# Allegro board dividers_v1.brd
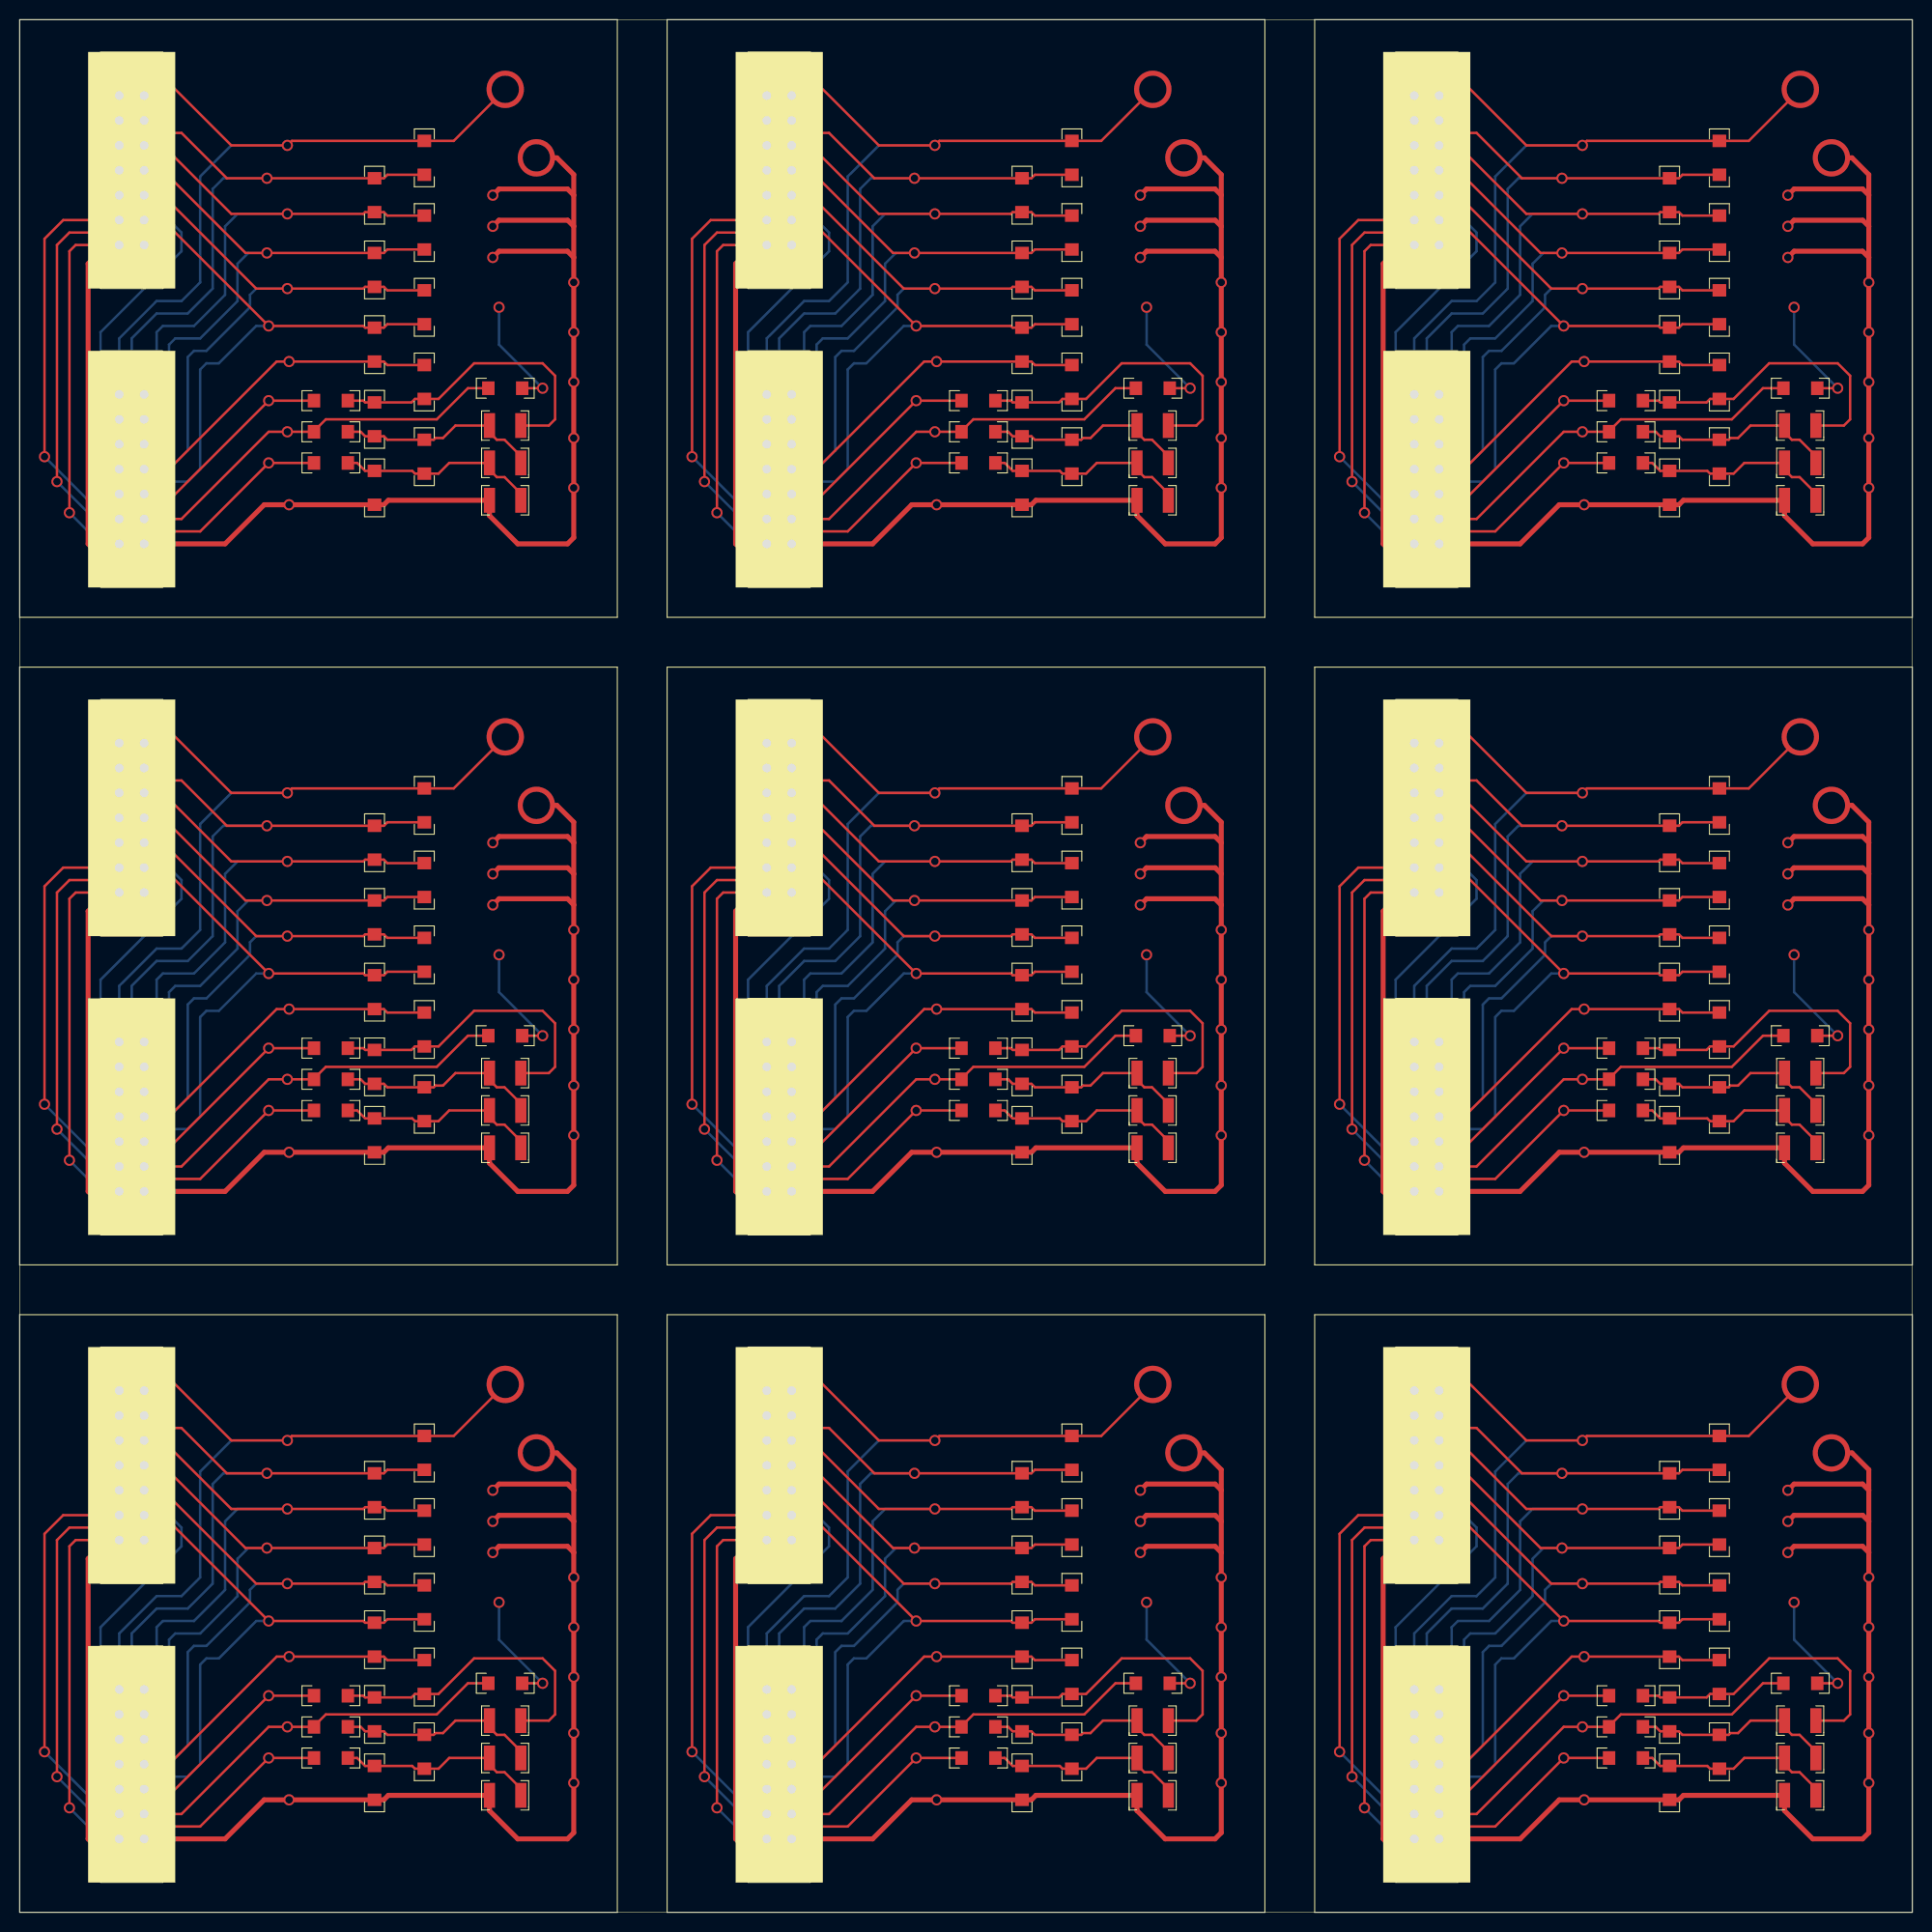
[diagram p0: board, top side]
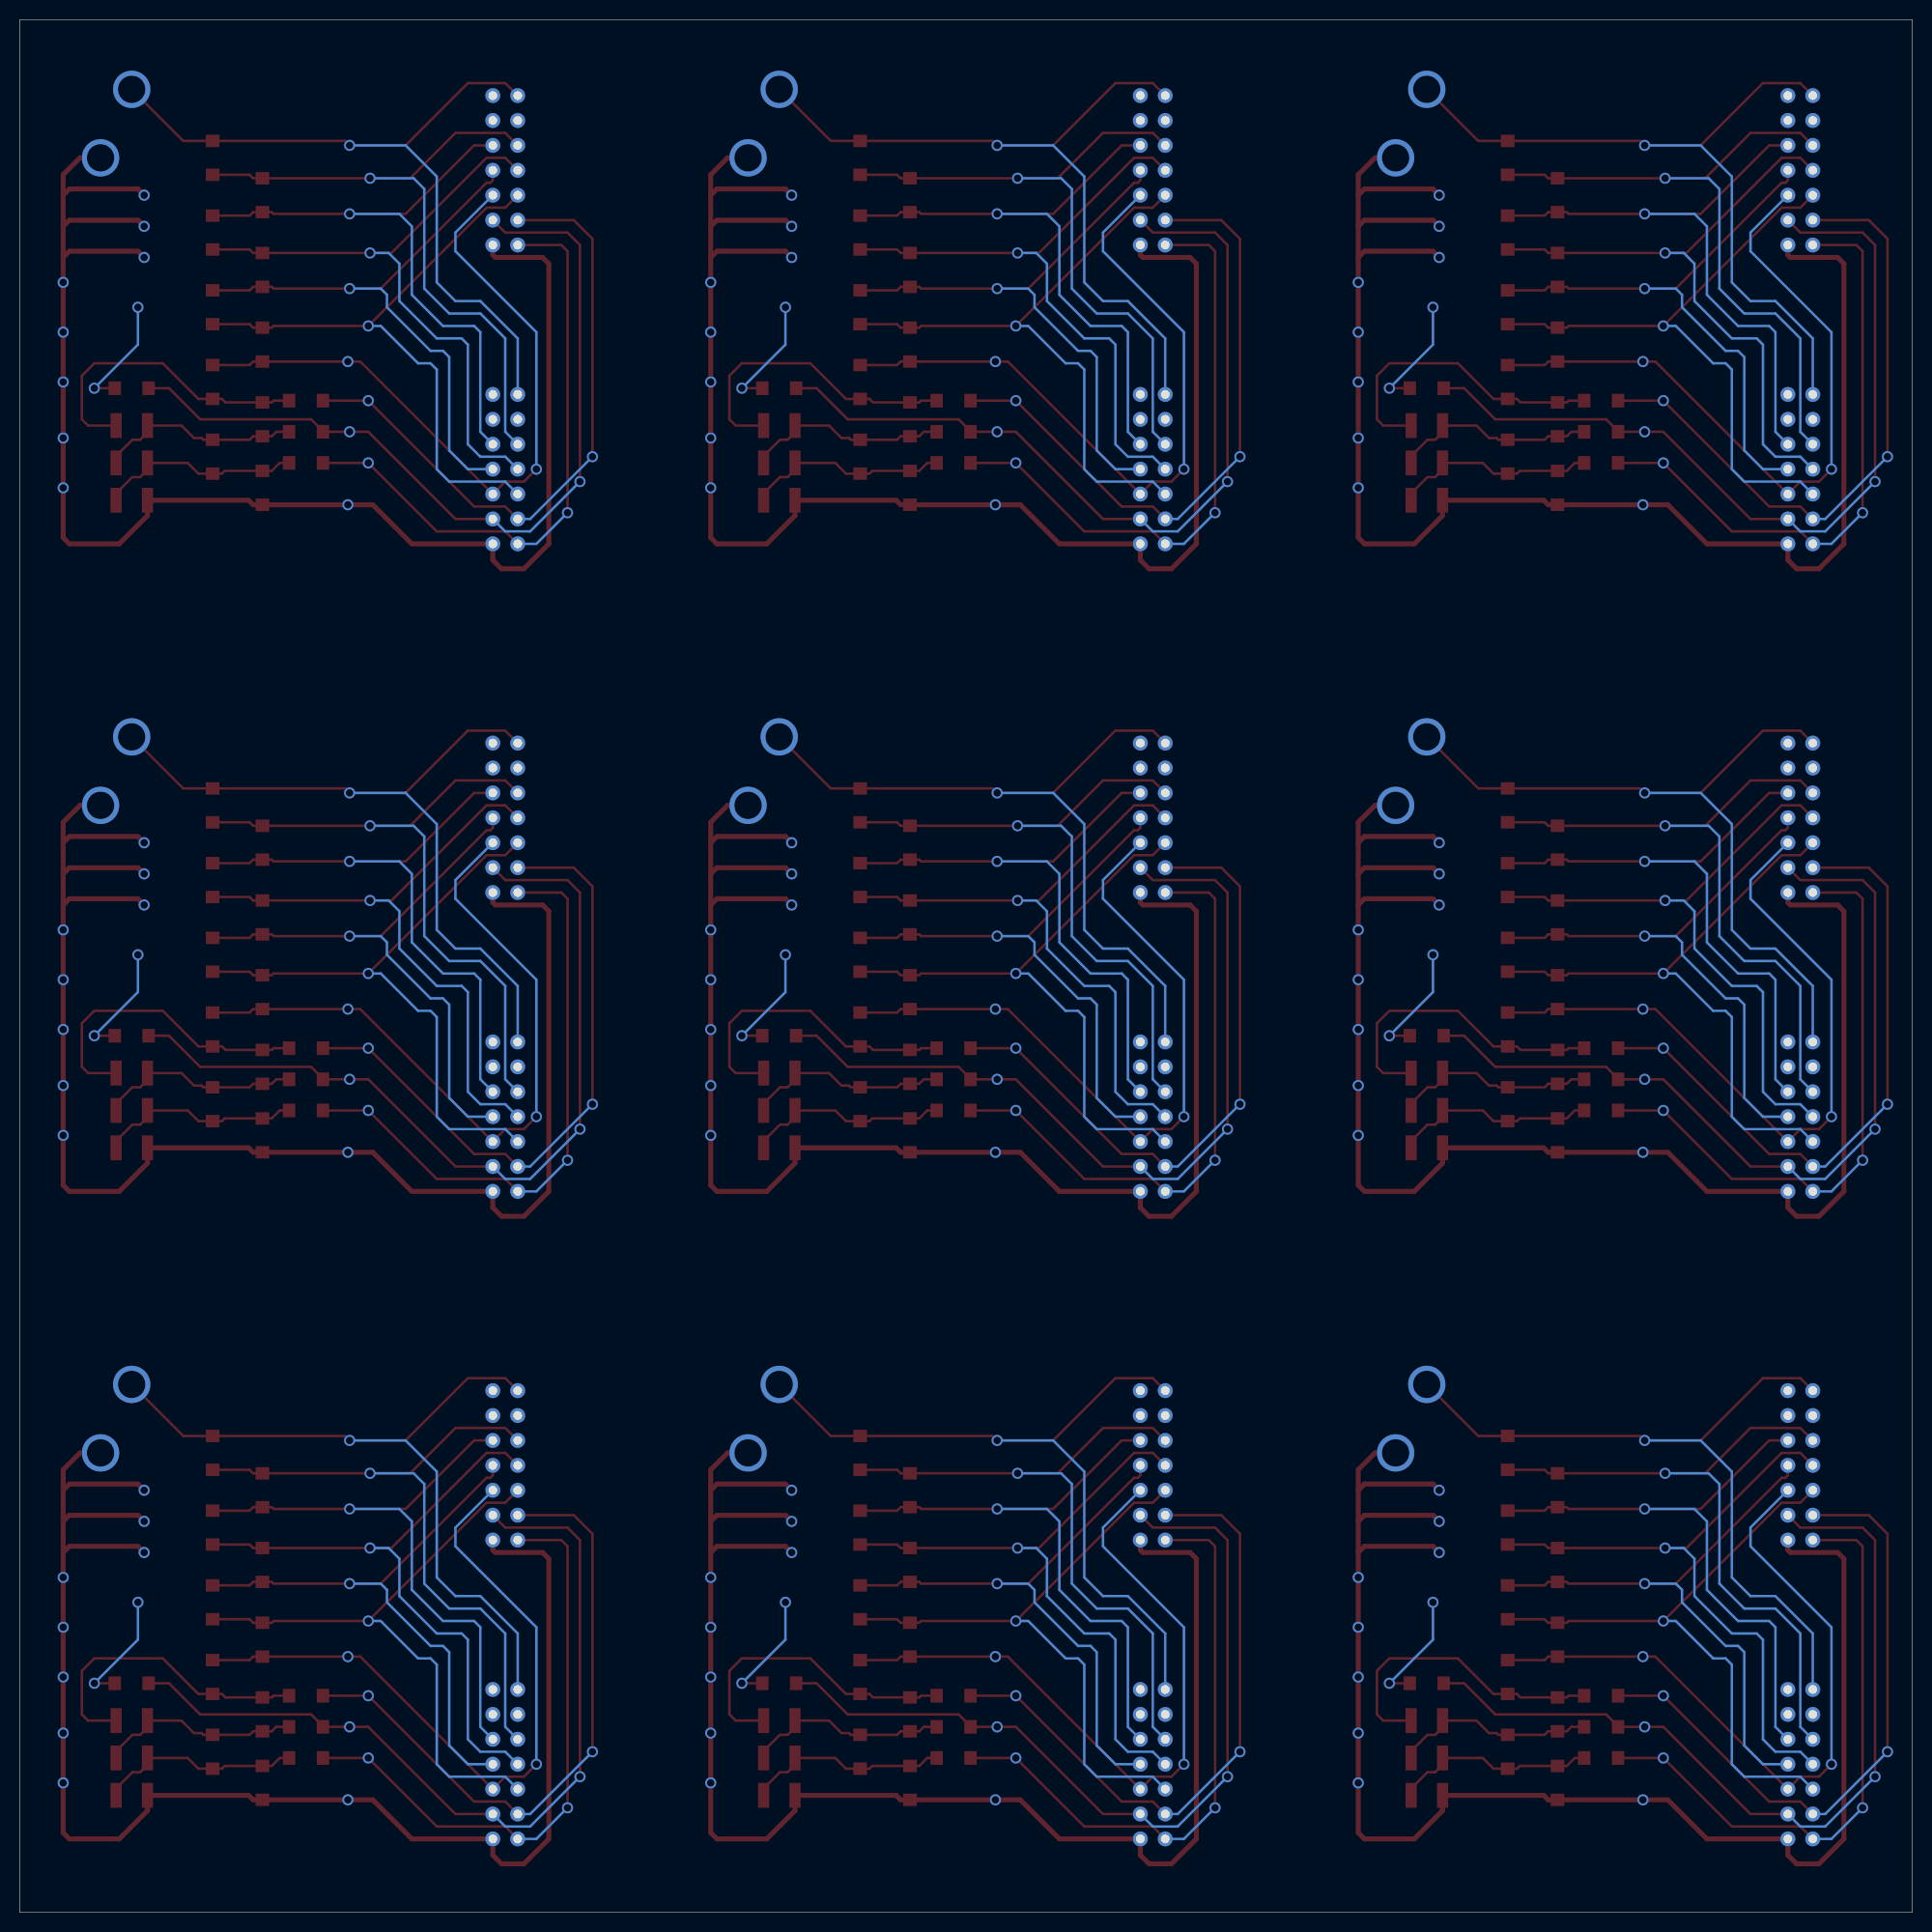
[diagram p1: board, bottom side, seen from below]

Outline 193.04 x 193.04 mm; copper layers: TOP, BOTTOM. Coordinates in mm from the lower left corner of the outline.
Outline path: 0,193.04 0,0 193.04,0 193.04,193.04 0,193.04

## Placement (name value [footprint] x y rotation side)
CT1  0.022UF  [C1210]  49.53 151.64 180 top
CT2  0.022UF  [C1210]  115.57 151.64 180 top
CT3  0.022UF  [C1210]  181.61 151.64 180 top
CT4  0.022UF  [C1210]  49.53 147.83 180 top
CT5  0.022UF  [C1210]  115.57 147.83 180 top
CT6  0.022UF  [C1210]  181.61 147.83 180 top
CT7  0.022UF  [C1210]  49.53 144.02 180 top
CT8  0.022UF  [C1210]  115.57 144.02 180 top
CT9  0.022UF  [C1210]  181.61 144.02 180 top
CT10  0.022UF  [C1210]  49.53 85.6 180 top
CT11  0.022UF  [C1210]  115.57 85.6 180 top
CT12  0.022UF  [C1210]  181.61 85.6 180 top
CT13  0.022UF  [C1210]  49.53 81.79 180 top
CT14  0.022UF  [C1210]  115.57 81.79 180 top
CT15  0.022UF  [C1210]  181.61 81.79 180 top
CT16  0.022UF  [C1210]  49.53 77.98 180 top
CT17  0.022UF  [C1210]  115.57 77.98 180 top
CT18  0.022UF  [C1210]  181.61 77.98 180 top
CT19  0.022UF  [C1210]  49.53 19.56 180 top
CT20  0.022UF  [C1210]  115.57 19.56 180 top
CT21  0.022UF  [C1210]  181.61 19.56 180 top
CT22  0.022UF  [C1210]  49.53 15.75 180 top
CT23  0.022UF  [C1210]  115.57 15.75 180 top
CT24  0.022UF  [C1210]  181.61 15.75 180 top
CT25  0.022UF  [C1210]  49.53 11.94 180 top
CT26  0.022UF  [C1210]  115.57 11.94 180 top
CT27  0.022UF  [C1210]  181.61 11.94 180 top
JT1  -  [HDR14]  11.43 177.67 0 top
JT2  -  [HDR14]  77.47 177.67 0 top
JT3  -  [HDR14]  143.51 177.67 0 top
JT4  -  [HDR14]  11.43 147.19 0 top
JT5  -  [HDR14]  77.47 147.19 0 top
JT6  -  [HDR14]  143.51 147.19 0 top
JT7  -  [HDR14]  11.43 111.63 0 top
JT8  -  [HDR14]  77.47 111.63 0 top
JT9  -  [HDR14]  143.51 111.63 0 top
JT10  -  [HDR14]  11.43 81.15 0 top
JT11  -  [HDR14]  77.47 81.15 0 top
JT12  -  [HDR14]  143.51 81.15 0 top
JT13  -  [HDR14]  11.43 45.59 0 top
JT14  -  [HDR14]  77.47 45.59 0 top
JT15  -  [HDR14]  143.51 45.59 0 top
JT16  -  [HDR14]  11.43 15.11 0 top
JT17  -  [HDR14]  77.47 15.11 0 top
JT18  -  [HDR14]  143.51 15.11 0 top
NOREF  -  []  0 193.04 0 top
NOREF#2  -  []  193.04 0 90 top
RT1  390K  [R1206]  41.27 178.94 270 top
RT2  390K  [R1206]  107.31 178.94 270 top
RT3  390K  [R1206]  173.35 178.94 270 top
RT4  1.44M  [R1206]  36.2 175.13 270 top
RT5  1.44M  [R1206]  102.23 175.13 270 top
RT6  1.44M  [R1206]  168.28 175.13 270 top
RT7  450K  [R1206]  41.27 171.32 270 top
RT8  450K  [R1206]  107.31 171.32 270 top
RT9  450K  [R1206]  173.35 171.32 270 top
RT10  450K  [R1206]  36.2 167.51 270 top
RT11  450K  [R1206]  102.23 167.51 270 top
RT12  450K  [R1206]  168.28 167.51 270 top
RT13  300K  [R1206]  41.27 163.7 270 top
RT14  300K  [R1206]  107.31 163.7 270 top
RT15  300K  [R1206]  173.35 163.7 270 top
RT16  300K  [R1206]  36.2 159.89 270 top
RT17  300K  [R1206]  102.23 159.89 270 top
RT18  300K  [R1206]  168.28 159.89 270 top
RT19  300K  [R1206]  41.27 156.08 270 top
RT20  300K  [R1206]  107.31 156.08 270 top
RT21  300K  [R1206]  173.35 156.08 270 top
RT22  1M  [R1206]  49.53 155.45 180 top
RT23  1M  [R1206]  115.57 155.45 180 top
RT24  1M  [R1206]  181.61 155.45 180 top
RT25  51  [R1206]  31.75 154.18 180 top
RT26  51  [R1206]  97.79 154.18 180 top
RT27  51  [R1206]  163.83 154.18 180 top
RT28  300K  [R1206]  36.2 152.27 270 top
RT29  300K  [R1206]  102.23 152.27 270 top
RT30  300K  [R1206]  168.28 152.27 270 top
RT31  51  [R1206]  31.75 151 180 top
RT32  51  [R1206]  97.79 151 180 top
RT33  51  [R1206]  163.83 151 180 top
RT34  300K  [R1206]  41.27 148.46 270 top
RT35  300K  [R1206]  107.31 148.46 270 top
RT36  300K  [R1206]  173.35 148.46 270 top
RT37  51  [R1206]  31.75 147.83 180 top
RT38  51  [R1206]  97.79 147.83 180 top
RT39  51  [R1206]  163.83 147.83 180 top
RT40  300K  [R1206]  36.2 145.29 270 top
RT41  300K  [R1206]  102.23 145.29 270 top
RT42  300K  [R1206]  168.28 145.29 270 top
RT43  390K  [R1206]  41.27 112.9 270 top
RT44  390K  [R1206]  107.31 112.9 270 top
RT45  390K  [R1206]  173.35 112.9 270 top
RT46  1.44M  [R1206]  36.2 109.09 270 top
RT47  1.44M  [R1206]  102.23 109.09 270 top
RT48  1.44M  [R1206]  168.28 109.09 270 top
RT49  450K  [R1206]  41.27 105.28 270 top
RT50  450K  [R1206]  107.31 105.28 270 top
RT51  450K  [R1206]  173.35 105.28 270 top
RT52  450K  [R1206]  36.2 101.47 270 top
RT53  450K  [R1206]  102.23 101.47 270 top
RT54  450K  [R1206]  168.28 101.47 270 top
RT55  300K  [R1206]  41.27 97.66 270 top
RT56  300K  [R1206]  107.31 97.66 270 top
RT57  300K  [R1206]  173.35 97.66 270 top
RT58  300K  [R1206]  36.2 93.85 270 top
RT59  300K  [R1206]  102.23 93.85 270 top
RT60  300K  [R1206]  168.28 93.85 270 top
RT61  300K  [R1206]  41.27 90.04 270 top
RT62  300K  [R1206]  107.31 90.04 270 top
RT63  300K  [R1206]  173.35 90.04 270 top
RT64  1M  [R1206]  49.53 89.41 180 top
RT65  1M  [R1206]  115.57 89.41 180 top
RT66  1M  [R1206]  181.61 89.41 180 top
RT67  51  [R1206]  31.75 88.14 180 top
RT68  51  [R1206]  97.79 88.14 180 top
RT69  51  [R1206]  163.83 88.14 180 top
RT70  300K  [R1206]  36.2 86.23 270 top
RT71  300K  [R1206]  102.23 86.23 270 top
RT72  300K  [R1206]  168.28 86.23 270 top
RT73  51  [R1206]  31.75 84.96 180 top
RT74  51  [R1206]  97.79 84.96 180 top
RT75  51  [R1206]  163.83 84.96 180 top
RT76  300K  [R1206]  41.27 82.42 270 top
RT77  300K  [R1206]  107.31 82.42 270 top
RT78  300K  [R1206]  173.35 82.42 270 top
RT79  51  [R1206]  31.75 81.79 180 top
RT80  51  [R1206]  97.79 81.79 180 top
RT81  51  [R1206]  163.83 81.79 180 top
RT82  300K  [R1206]  36.2 79.25 270 top
RT83  300K  [R1206]  102.23 79.25 270 top
RT84  300K  [R1206]  168.28 79.25 270 top
RT85  390K  [R1206]  41.27 46.86 270 top
RT86  390K  [R1206]  107.31 46.86 270 top
RT87  390K  [R1206]  173.35 46.86 270 top
RT88  1.44M  [R1206]  36.2 43.05 270 top
RT89  1.44M  [R1206]  102.23 43.05 270 top
RT90  1.44M  [R1206]  168.28 43.05 270 top
RT91  450K  [R1206]  41.27 39.24 270 top
RT92  450K  [R1206]  107.31 39.24 270 top
RT93  450K  [R1206]  173.35 39.24 270 top
RT94  450K  [R1206]  36.2 35.43 270 top
RT95  450K  [R1206]  102.23 35.43 270 top
RT96  450K  [R1206]  168.28 35.43 270 top
RT97  300K  [R1206]  41.27 31.62 270 top
RT98  300K  [R1206]  107.31 31.62 270 top
RT99  300K  [R1206]  173.35 31.62 270 top
RT100  300K  [R1206]  36.2 27.81 270 top
RT101  300K  [R1206]  102.23 27.81 270 top
RT102  300K  [R1206]  168.28 27.81 270 top
RT103  300K  [R1206]  41.27 24 270 top
RT104  300K  [R1206]  107.31 24 270 top
RT105  300K  [R1206]  173.35 24 270 top
RT106  1M  [R1206]  49.53 23.37 180 top
RT107  1M  [R1206]  115.57 23.37 180 top
RT108  1M  [R1206]  181.61 23.37 180 top
RT109  51  [R1206]  31.75 22.1 180 top
RT110  51  [R1206]  97.79 22.1 180 top
RT111  51  [R1206]  163.83 22.1 180 top
RT112  300K  [R1206]  36.2 20.19 270 top
RT113  300K  [R1206]  102.23 20.19 270 top
RT114  300K  [R1206]  168.28 20.19 270 top
RT115  51  [R1206]  31.75 18.92 180 top
RT116  51  [R1206]  97.79 18.92 180 top
RT117  51  [R1206]  163.83 18.92 180 top
RT118  300K  [R1206]  41.27 16.38 270 top
RT119  300K  [R1206]  107.31 16.38 270 top
RT120  300K  [R1206]  173.35 16.38 270 top
RT121  51  [R1206]  31.75 15.75 180 top
RT122  51  [R1206]  97.79 15.75 180 top
RT123  51  [R1206]  163.83 15.75 180 top
RT124  300K  [R1206]  36.2 13.21 270 top
RT125  300K  [R1206]  102.23 13.21 270 top
RT126  300K  [R1206]  168.28 13.21 270 top

## Library data of the parts
CT1-CT27 = CSMD1210: alternate symbols: (C1206); part number: CSMD1210-0.022UF,20%,1210,2KV
JT1-JT18 = CONN14
RT1-RT3 RT43-RT45 RT85-RT87 = RSMD1206: part number: RSMD1206-390K,5%,1206
RT4-RT6 RT46-RT48 RT88-RT90 = RSMD1206: part number: RSMD1206-1.44M,5%,1206
RT7-RT12 RT49-RT54 RT91-RT96 = RSMD1206: part number: RSMD1206-450K,5%,1206
RT13-RT21 RT28-RT30 RT34-RT36 RT40-RT42 RT55-RT63 RT70-RT72 RT76-RT78 RT82-RT84 RT97-RT105 RT112-RT114 RT118-RT120 RT124-RT126 = RSMD1206: part number: RSMD1206-300K,5%,1206
RT22-RT24 RT64-RT66 RT106-RT108 = RSMD1206: part number: RSMD1206-1M,5%,1206
RT25-RT27 RT31-RT33 RT37-RT39 RT67-RT69 RT73-RT75 RT79-RT81 RT109-RT111 RT115-RT117 RT121-RT123 = RSMD1206: part number: RSMD1206-51,5%,1206

## Footprints (pads in the part's own frame, mm; a bottom-side part is the same pattern mirrored in y, then rotated)
C1210
  rect 1.143x2.54 smd: 1(-1.587,0) 2(1.612,0)
HDR14
  round 1.524 hole 0.889: 1(-1.27,7.62) 2(1.27,7.62) 3(-1.27,5.08) 4(1.27,5.08) 5(-1.27,2.54) 6(1.27,2.54) 7(-1.27,0) 8(1.27,0) 9(-1.27,-2.54) 10(1.27,-2.54) 11(-1.27,-5.08) 12(1.27,-5.08) 13(-1.27,-7.62) 14(1.27,-7.62)
R1206
  rect 1.27x1.397 smd: 1(-1.727,0) 2(1.727,0)

## Nets
GND_1: CT25.2(B<0>) JT13.14 JT16.14 RT124.2(B<0>)
GND_2: CT26.2(B<0>) JT14.14 JT17.14 RT125.2(B<0>)
GND_3: CT27.2(B<0>) JT15.14 JT18.14 RT126.2(B<0>)
GND_4: CT16.2(B<0>) JT7.14 JT10.14 RT82.2(B<0>)
GND_5: CT17.2(B<0>) JT8.14 JT11.14 RT83.2(B<0>)
GND_6: CT18.2(B<0>) JT9.14 JT12.14 RT84.2(B<0>)
GND_7: CT7.2(B<0>) JT1.14 JT4.14 RT40.2(B<0>)
GND_8: CT8.2(B<0>) JT2.14 JT5.14 RT41.2(B<0>)
GND_9: CT9.2(B<0>) JT3.14 JT6.14 RT42.2(B<0>)
-HV_1: JT13.1 JT16.1 RT85.1(A<0>)
-HV_2: JT14.1 JT17.1 RT86.1(A<0>)
-HV_3: JT15.1 JT18.1 RT87.1(A<0>)
-HV_4: JT7.1 JT10.1 RT43.1(A<0>)
-HV_5: JT8.1 JT11.1 RT44.1(A<0>)
-HV_6: JT9.1 JT12.1 RT45.1(A<0>)
-HV_7: JT1.1 JT4.1 RT1.1(A<0>)
-HV_8: JT2.1 JT5.1 RT2.1(A<0>)
-HV_9: JT3.1 JT6.1 RT3.1(A<0>)
ACC_1: RT106.1(A<0>)
ACC_2: RT107.1(A<0>)
ACC_3: RT108.1(A<0>)
ACC_4: RT64.1(A<0>)
ACC_5: RT65.1(A<0>)
ACC_6: RT66.1(A<0>)
ACC_7: RT22.1(A<0>)
ACC_8: RT23.1(A<0>)
ACC_9: RT24.1(A<0>)
UNNAMED_1_CONN14_I18_5_1: JT13.5 JT16.5 RT85.2(B<0>) RT88.1(A<0>)
UNNAMED_1_CONN14_I18_5_2: JT14.5 JT17.5 RT86.2(B<0>) RT89.1(A<0>)
UNNAMED_1_CONN14_I18_5_3: JT15.5 JT18.5 RT87.2(B<0>) RT90.1(A<0>)
UNNAMED_1_CONN14_I18_5_4: JT7.5 JT10.5 RT43.2(B<0>) RT46.1(A<0>)
UNNAMED_1_CONN14_I18_5_5: JT8.5 JT11.5 RT44.2(B<0>) RT47.1(A<0>)
UNNAMED_1_CONN14_I18_5_6: JT9.5 JT12.5 RT45.2(B<0>) RT48.1(A<0>)
UNNAMED_1_CONN14_I18_5_7: JT1.5 JT4.5 RT1.2(B<0>) RT4.1(A<0>)
UNNAMED_1_CONN14_I18_5_8: JT2.5 JT5.5 RT2.2(B<0>) RT5.1(A<0>)
UNNAMED_1_CONN14_I18_5_9: JT3.5 JT6.5 RT3.2(B<0>) RT6.1(A<0>)
UNNAMED_1_CONN14_I18_6_1: JT13.6 JT16.6 RT88.2(B<0>) RT91.1(A<0>)
UNNAMED_1_CONN14_I18_6_2: JT14.6 JT17.6 RT89.2(B<0>) RT92.1(A<0>)
UNNAMED_1_CONN14_I18_6_3: JT15.6 JT18.6 RT90.2(B<0>) RT93.1(A<0>)
UNNAMED_1_CONN14_I18_6_4: JT7.6 JT10.6 RT46.2(B<0>) RT49.1(A<0>)
UNNAMED_1_CONN14_I18_6_5: JT8.6 JT11.6 RT47.2(B<0>) RT50.1(A<0>)
UNNAMED_1_CONN14_I18_6_6: JT9.6 JT12.6 RT48.2(B<0>) RT51.1(A<0>)
UNNAMED_1_CONN14_I18_6_7: JT1.6 JT4.6 RT4.2(B<0>) RT7.1(A<0>)
UNNAMED_1_CONN14_I18_6_8: JT2.6 JT5.6 RT5.2(B<0>) RT8.1(A<0>)
UNNAMED_1_CONN14_I18_6_9: JT3.6 JT6.6 RT6.2(B<0>) RT9.1(A<0>)
UNNAMED_1_CONN14_I18_7_1: JT13.7 JT16.7 RT91.2(B<0>) RT94.1(A<0>)
UNNAMED_1_CONN14_I18_7_2: JT14.7 JT17.7 RT92.2(B<0>) RT95.1(A<0>)
UNNAMED_1_CONN14_I18_7_3: JT15.7 JT18.7 RT93.2(B<0>) RT96.1(A<0>)
UNNAMED_1_CONN14_I18_7_4: JT7.7 JT10.7 RT49.2(B<0>) RT52.1(A<0>)
UNNAMED_1_CONN14_I18_7_5: JT8.7 JT11.7 RT50.2(B<0>) RT53.1(A<0>)
UNNAMED_1_CONN14_I18_7_6: JT9.7 JT12.7 RT51.2(B<0>) RT54.1(A<0>)
UNNAMED_1_CONN14_I18_7_7: JT1.7 JT4.7 RT7.2(B<0>) RT10.1(A<0>)
UNNAMED_1_CONN14_I18_7_8: JT2.7 JT5.7 RT8.2(B<0>) RT11.1(A<0>)
UNNAMED_1_CONN14_I18_7_9: JT3.7 JT6.7 RT9.2(B<0>) RT12.1(A<0>)
UNNAMED_1_CONN14_I18_8_1: JT13.8 JT16.8 RT94.2(B<0>) RT97.1(A<0>)
UNNAMED_1_CONN14_I18_8_2: JT14.8 JT17.8 RT95.2(B<0>) RT98.1(A<0>)
UNNAMED_1_CONN14_I18_8_3: JT15.8 JT18.8 RT96.2(B<0>) RT99.1(A<0>)
UNNAMED_1_CONN14_I18_8_4: JT7.8 JT10.8 RT52.2(B<0>) RT55.1(A<0>)
UNNAMED_1_CONN14_I18_8_5: JT8.8 JT11.8 RT53.2(B<0>) RT56.1(A<0>)
UNNAMED_1_CONN14_I18_8_6: JT9.8 JT12.8 RT54.2(B<0>) RT57.1(A<0>)
UNNAMED_1_CONN14_I18_8_7: JT1.8 JT4.8 RT10.2(B<0>) RT13.1(A<0>)
UNNAMED_1_CONN14_I18_8_8: JT2.8 JT5.8 RT11.2(B<0>) RT14.1(A<0>)
UNNAMED_1_CONN14_I18_8_9: JT3.8 JT6.8 RT12.2(B<0>) RT15.1(A<0>)
UNNAMED_1_CONN14_I18_9_1: JT13.9 JT16.9 RT97.2(B<0>) RT100.1(A<0>)
UNNAMED_1_CONN14_I18_9_2: JT14.9 JT17.9 RT98.2(B<0>) RT101.1(A<0>)
UNNAMED_1_CONN14_I18_9_3: JT15.9 JT18.9 RT99.2(B<0>) RT102.1(A<0>)
UNNAMED_1_CONN14_I18_9_4: JT7.9 JT10.9 RT55.2(B<0>) RT58.1(A<0>)
UNNAMED_1_CONN14_I18_9_5: JT8.9 JT11.9 RT56.2(B<0>) RT59.1(A<0>)
UNNAMED_1_CONN14_I18_9_6: JT9.9 JT12.9 RT57.2(B<0>) RT60.1(A<0>)
UNNAMED_1_CONN14_I18_9_7: JT1.9 JT4.9 RT13.2(B<0>) RT16.1(A<0>)
UNNAMED_1_CONN14_I18_9_8: JT2.9 JT5.9 RT14.2(B<0>) RT17.1(A<0>)
UNNAMED_1_CONN14_I18_9_9: JT3.9 JT6.9 RT15.2(B<0>) RT18.1(A<0>)
UNNAMED_1_CONN14_I18_10_1: JT13.10 JT16.10 RT100.2(B<0>) RT103.1(A<0>)
UNNAMED_1_CONN14_I18_10_2: JT14.10 JT17.10 RT101.2(B<0>) RT104.1(A<0>)
UNNAMED_1_CONN14_I18_10_3: JT15.10 JT18.10 RT102.2(B<0>) RT105.1(A<0>)
UNNAMED_1_CONN14_I18_10_4: JT7.10 JT10.10 RT58.2(B<0>) RT61.1(A<0>)
UNNAMED_1_CONN14_I18_10_5: JT8.10 JT11.10 RT59.2(B<0>) RT62.1(A<0>)
UNNAMED_1_CONN14_I18_10_6: JT9.10 JT12.10 RT60.2(B<0>) RT63.1(A<0>)
UNNAMED_1_CONN14_I18_10_7: JT1.10 JT4.10 RT16.2(B<0>) RT19.1(A<0>)
UNNAMED_1_CONN14_I18_10_8: JT2.10 JT5.10 RT17.2(B<0>) RT20.1(A<0>)
UNNAMED_1_CONN14_I18_10_9: JT3.10 JT6.10 RT18.2(B<0>) RT21.1(A<0>)
UNNAMED_1_CONN14_I18_11_1: JT13.11 JT16.11 RT109.2(B<0>)
UNNAMED_1_CONN14_I18_11_2: JT14.11 JT17.11 RT110.2(B<0>)
UNNAMED_1_CONN14_I18_11_3: JT15.11 JT18.11 RT111.2(B<0>)
UNNAMED_1_CONN14_I18_11_4: JT7.11 JT10.11 RT67.2(B<0>)
UNNAMED_1_CONN14_I18_11_5: JT8.11 JT11.11 RT68.2(B<0>)
UNNAMED_1_CONN14_I18_11_6: JT9.11 JT12.11 RT69.2(B<0>)
UNNAMED_1_CONN14_I18_11_7: JT1.11 JT4.11 RT25.2(B<0>)
UNNAMED_1_CONN14_I18_11_8: JT2.11 JT5.11 RT26.2(B<0>)
UNNAMED_1_CONN14_I18_11_9: JT3.11 JT6.11 RT27.2(B<0>)
UNNAMED_1_CONN14_I18_12_1: JT13.12 JT16.12 RT106.2(B<0>) RT115.2(B<0>)
UNNAMED_1_CONN14_I18_12_2: JT14.12 JT17.12 RT107.2(B<0>) RT116.2(B<0>)
UNNAMED_1_CONN14_I18_12_3: JT15.12 JT18.12 RT108.2(B<0>) RT117.2(B<0>)
UNNAMED_1_CONN14_I18_12_4: JT7.12 JT10.12 RT64.2(B<0>) RT73.2(B<0>)
UNNAMED_1_CONN14_I18_12_5: JT8.12 JT11.12 RT65.2(B<0>) RT74.2(B<0>)
UNNAMED_1_CONN14_I18_12_6: JT9.12 JT12.12 RT66.2(B<0>) RT75.2(B<0>)
UNNAMED_1_CONN14_I18_12_7: JT1.12 JT4.12 RT22.2(B<0>) RT31.2(B<0>)
UNNAMED_1_CONN14_I18_12_8: JT2.12 JT5.12 RT23.2(B<0>) RT32.2(B<0>)
UNNAMED_1_CONN14_I18_12_9: JT3.12 JT6.12 RT24.2(B<0>) RT33.2(B<0>)
UNNAMED_1_CONN14_I18_13_1: JT13.13 JT16.13 RT121.2(B<0>)
UNNAMED_1_CONN14_I18_13_2: JT14.13 JT17.13 RT122.2(B<0>)
UNNAMED_1_CONN14_I18_13_3: JT15.13 JT18.13 RT123.2(B<0>)
UNNAMED_1_CONN14_I18_13_4: JT7.13 JT10.13 RT79.2(B<0>)
UNNAMED_1_CONN14_I18_13_5: JT8.13 JT11.13 RT80.2(B<0>)
UNNAMED_1_CONN14_I18_13_6: JT9.13 JT12.13 RT81.2(B<0>)
UNNAMED_1_CONN14_I18_13_7: JT1.13 JT4.13 RT37.2(B<0>)
UNNAMED_1_CONN14_I18_13_8: JT2.13 JT5.13 RT38.2(B<0>)
UNNAMED_1_CONN14_I18_13_9: JT3.13 JT6.13 RT39.2(B<0>)
UNNAMED_1_CSMD1210_I15_A_1: CT19.1(A<0>) RT103.2(B<0>) RT109.1(A<0>) RT112.1(A<0>)
UNNAMED_1_CSMD1210_I15_A_2: CT20.1(A<0>) RT104.2(B<0>) RT110.1(A<0>) RT113.1(A<0>)
UNNAMED_1_CSMD1210_I15_A_3: CT21.1(A<0>) RT105.2(B<0>) RT111.1(A<0>) RT114.1(A<0>)
UNNAMED_1_CSMD1210_I15_A_4: CT10.1(A<0>) RT61.2(B<0>) RT67.1(A<0>) RT70.1(A<0>)
UNNAMED_1_CSMD1210_I15_A_5: CT11.1(A<0>) RT62.2(B<0>) RT68.1(A<0>) RT71.1(A<0>)
UNNAMED_1_CSMD1210_I15_A_6: CT12.1(A<0>) RT63.2(B<0>) RT69.1(A<0>) RT72.1(A<0>)
UNNAMED_1_CSMD1210_I15_A_7: CT1.1(A<0>) RT19.2(B<0>) RT25.1(A<0>) RT28.1(A<0>)
UNNAMED_1_CSMD1210_I15_A_8: CT2.1(A<0>) RT20.2(B<0>) RT26.1(A<0>) RT29.1(A<0>)
UNNAMED_1_CSMD1210_I15_A_9: CT3.1(A<0>) RT21.2(B<0>) RT27.1(A<0>) RT30.1(A<0>)
UNNAMED_1_CSMD1210_I15_B_1: CT19.2(B<0>) CT22.1(A<0>) RT112.2(B<0>) RT115.1(A<0>) RT118.1(A<0>)
UNNAMED_1_CSMD1210_I15_B_2: CT20.2(B<0>) CT23.1(A<0>) RT113.2(B<0>) RT116.1(A<0>) RT119.1(A<0>)
UNNAMED_1_CSMD1210_I15_B_3: CT21.2(B<0>) CT24.1(A<0>) RT114.2(B<0>) RT117.1(A<0>) RT120.1(A<0>)
UNNAMED_1_CSMD1210_I15_B_4: CT10.2(B<0>) CT13.1(A<0>) RT70.2(B<0>) RT73.1(A<0>) RT76.1(A<0>)
UNNAMED_1_CSMD1210_I15_B_5: CT11.2(B<0>) CT14.1(A<0>) RT71.2(B<0>) RT74.1(A<0>) RT77.1(A<0>)
UNNAMED_1_CSMD1210_I15_B_6: CT12.2(B<0>) CT15.1(A<0>) RT72.2(B<0>) RT75.1(A<0>) RT78.1(A<0>)
UNNAMED_1_CSMD1210_I15_B_7: CT1.2(B<0>) CT4.1(A<0>) RT28.2(B<0>) RT31.1(A<0>) RT34.1(A<0>)
UNNAMED_1_CSMD1210_I15_B_8: CT2.2(B<0>) CT5.1(A<0>) RT29.2(B<0>) RT32.1(A<0>) RT35.1(A<0>)
UNNAMED_1_CSMD1210_I15_B_9: CT3.2(B<0>) CT6.1(A<0>) RT30.2(B<0>) RT33.1(A<0>) RT36.1(A<0>)
UNNAMED_1_CSMD1210_I16_A_1: CT22.2(B<0>) CT25.1(A<0>) RT118.2(B<0>) RT121.1(A<0>) RT124.1(A<0>)
UNNAMED_1_CSMD1210_I16_A_2: CT23.2(B<0>) CT26.1(A<0>) RT119.2(B<0>) RT122.1(A<0>) RT125.1(A<0>)
UNNAMED_1_CSMD1210_I16_A_3: CT24.2(B<0>) CT27.1(A<0>) RT120.2(B<0>) RT123.1(A<0>) RT126.1(A<0>)
UNNAMED_1_CSMD1210_I16_A_4: CT13.2(B<0>) CT16.1(A<0>) RT76.2(B<0>) RT79.1(A<0>) RT82.1(A<0>)
UNNAMED_1_CSMD1210_I16_A_5: CT14.2(B<0>) CT17.1(A<0>) RT77.2(B<0>) RT80.1(A<0>) RT83.1(A<0>)
UNNAMED_1_CSMD1210_I16_A_6: CT15.2(B<0>) CT18.1(A<0>) RT78.2(B<0>) RT81.1(A<0>) RT84.1(A<0>)
UNNAMED_1_CSMD1210_I16_A_7: CT4.2(B<0>) CT7.1(A<0>) RT34.2(B<0>) RT37.1(A<0>) RT40.1(A<0>)
UNNAMED_1_CSMD1210_I16_A_8: CT5.2(B<0>) CT8.1(A<0>) RT35.2(B<0>) RT38.1(A<0>) RT41.1(A<0>)
UNNAMED_1_CSMD1210_I16_A_9: CT6.2(B<0>) CT9.1(A<0>) RT36.2(B<0>) RT39.1(A<0>) RT42.1(A<0>)

Pads without a net: JT1 2 3 4; JT2 2 3 4; JT3 2 3 4; JT4 2 3 4; JT5 2 3 4; JT6 2 3 4; JT7 2 3 4; JT8 2 3 4; JT9 2 3 4; JT10 2 3 4; JT11 2 3 4; JT12 2 3 4; JT13 2 3 4; JT14 2 3 4; JT15 2 3 4; JT16 2 3 4; JT17 2 3 4; JT18 2 3 4

## Via types
v1: diameter 1.143, hole 0.762, TOP to BOTTOM, 225 vias
v2: diameter 3.81, hole 2.794, TOP to BOTTOM, 18 vias

## Routing (per net, layer and track width the routed paths; a pad name or vN(x,y) marks a point on that pad's centre or on a via; arc(x,y) is an arc through that point)
GND_1: length 161
  TOP w0.508: 56.52,36.7 v1(56.52,34.16) v1(56.52,29.08) v1(56.52,24) v1(56.52,18.29) v1(56.52,13.21) 56.52,8.13 55.88,7.49 50.8,7.49 47.92,10.38 CT25.2 37.6,11.94 37.15,11.48 RT124.2 v1(27.48,11.48) 24.94,11.48 20.95,7.49 JT16.14 12.7,5.84 11.81,4.95 9.53,4.95 6.99,7.49 6.99,36.07 7.62,36.7 12.45,36.7 12.7,36.96 12.7,37.97 ; 56.52,36.7 55.88,37.34 48.9,37.34 v1(48.26,36.7) ; 56.52,36.7 56.52,39.88 ; 56.52,39.88 56.52,43.05 ; 56.52,39.88 55.9,40.5 48.88,40.5 v1(48.26,39.88) ; 56.52,43.05 55.88,43.69 48.9,43.69 v1(48.26,43.05) ; 56.52,43.05 56.52,45.15 54.8,46.86 v2(52.7,46.86)
GND_2: length 161
  TOP w0.508: 78.74,37.97 78.74,36.96 78.49,36.7 73.66,36.7 73.03,36.07 73.03,7.49 75.56,4.95 77.85,4.95 78.74,5.84 JT17.14 87,7.49 90.98,11.48 v1(93.52,11.48) RT125.2 103.19,11.48 103.64,11.94 CT26.2 113.96,10.38 116.84,7.49 121.92,7.49 122.56,8.13 v1(122.56,13.21) v1(122.56,18.29) v1(122.56,24) v1(122.56,29.08) v1(122.56,34.16) 122.56,36.7 ; v1(114.3,39.88) 114.92,40.5 121.94,40.5 122.56,39.88 ; v1(114.3,36.7) 114.94,37.34 121.92,37.34 122.56,36.7 ; 122.56,39.88 122.56,43.05 ; 122.56,39.88 122.56,36.7 ; 122.56,43.05 122.56,45.15 120.84,46.86 v2(118.75,46.86) ; 122.56,43.05 121.92,43.69 114.94,43.69 v1(114.3,43.05)
GND_3: length 161
  TOP w0.508: v1(180.34,43.05) 180.97,43.69 187.96,43.69 188.59,43.05 ; 188.59,36.7 188.59,39.88 ; 188.59,36.7 187.96,37.34 180.97,37.34 v1(180.34,36.7) ; 188.59,36.7 v1(188.59,34.16) v1(188.59,29.08) v1(188.59,24) v1(188.59,18.29) v1(188.59,13.21) 188.59,8.13 187.96,7.49 182.88,7.49 180,10.38 CT27.2 169.68,11.94 169.23,11.48 RT126.2 v1(159.56,11.48) 157.02,11.48 153.03,7.49 JT18.14 144.78,5.84 143.89,4.95 141.6,4.95 139.06,7.49 139.06,36.07 139.7,36.7 144.53,36.7 144.78,36.96 144.78,37.97 ; 188.59,39.88 187.98,40.5 180.96,40.5 v1(180.34,39.88) ; 188.59,39.88 188.59,43.05 ; 188.59,43.05 188.59,45.15 186.88,46.86 v2(184.78,46.86)
GND_4: length 161
  TOP w0.508: JT7.14 12.7,103 12.45,102.74 7.62,102.74 6.99,102.11 6.99,73.53 9.53,70.99 11.81,70.99 12.7,71.88 JT10.14 20.95,73.53 24.94,77.52 v1(27.48,77.52) RT82.2 37.15,77.52 37.6,77.98 CT16.2 47.92,76.42 50.8,73.53 55.88,73.53 56.52,74.17 v1(56.52,79.25) v1(56.52,84.33) v1(56.52,90.04) v1(56.52,95.12) v1(56.52,100.2) 56.52,102.74 ; 56.52,105.92 55.9,106.54 48.88,106.54 v1(48.26,105.92) ; 56.52,105.92 56.52,102.74 ; 56.52,105.92 56.52,109.09 ; 56.52,102.74 55.88,103.38 48.9,103.38 v1(48.26,102.74) ; v1(48.26,109.09) 48.9,109.73 55.88,109.73 56.52,109.09 ; 56.52,109.09 56.52,111.19 54.8,112.9 v2(52.7,112.9)
GND_5: length 161
  TOP w0.508: 122.56,105.92 121.94,106.54 114.92,106.54 v1(114.3,105.92) ; 122.56,105.92 122.56,109.09 ; 122.56,105.92 122.56,102.74 ; 122.56,109.09 122.56,111.19 120.84,112.9 v2(118.75,112.9) ; 122.56,109.09 121.92,109.73 114.94,109.73 v1(114.3,109.09) ; 122.56,102.74 121.92,103.38 114.94,103.38 v1(114.3,102.74) ; 122.56,102.74 v1(122.56,100.2) v1(122.56,95.12) v1(122.56,90.04) v1(122.56,84.33) v1(122.56,79.25) 122.56,74.17 121.92,73.53 116.84,73.53 113.96,76.42 CT17.2 103.64,77.98 103.19,77.52 RT83.2 v1(93.52,77.52) 90.98,77.52 87,73.53 JT11.14 78.74,71.88 77.85,70.99 75.56,70.99 73.03,73.53 73.03,102.11 73.66,102.74 78.49,102.74 78.74,103 JT8.14
GND_6: length 161
  TOP w0.508: JT9.14 144.78,103 144.53,102.74 139.7,102.74 139.06,102.11 139.06,73.53 141.6,70.99 143.89,70.99 144.78,71.88 JT12.14 153.03,73.53 157.02,77.52 v1(159.56,77.52) RT84.2 169.23,77.52 169.68,77.98 CT18.2 180,76.42 182.88,73.53 187.96,73.53 188.59,74.17 v1(188.59,79.25) v1(188.59,84.33) v1(188.59,90.04) v1(188.59,95.12) v1(188.59,100.2) 188.59,102.74 ; v1(180.34,109.09) 180.97,109.73 187.96,109.73 188.59,109.09 ; 188.59,102.74 187.96,103.38 180.97,103.38 v1(180.34,102.74) ; 188.59,102.74 188.59,105.92 ; 188.59,109.09 188.59,105.92 ; 188.59,109.09 188.59,111.19 186.88,112.9 v2(184.78,112.9) ; 188.59,105.92 187.98,106.54 180.96,106.54 v1(180.34,105.92)
GND_7: length 161
  TOP w0.508: v1(48.26,175.13) 48.9,175.77 55.88,175.77 56.52,175.13 ; 56.52,168.78 56.52,171.96 ; 56.52,168.78 v1(56.52,166.24) v1(56.52,161.16) v1(56.52,156.08) v1(56.52,150.37) v1(56.52,145.29) 56.52,140.21 55.88,139.57 50.8,139.57 47.92,142.46 CT7.2 37.6,144.02 37.15,143.56 RT40.2 v1(27.48,143.56) 24.94,143.56 20.95,139.57 JT4.14 12.7,137.92 11.81,137.03 9.53,137.03 6.99,139.57 6.99,168.15 7.62,168.78 12.45,168.78 12.7,169.04 JT1.14 ; 56.52,168.78 55.88,169.42 48.9,169.42 v1(48.26,168.78) ; 56.52,171.96 56.52,175.13 ; 56.52,171.96 55.9,172.58 48.88,172.58 v1(48.26,171.96) ; v2(52.7,178.94) 54.8,178.94 56.52,177.23 56.52,175.13
GND_8: length 161
  TOP w0.508: v1(114.3,175.13) 114.94,175.77 121.92,175.77 122.56,175.13 ; v1(114.3,171.96) 114.92,172.58 121.94,172.58 122.56,171.96 ; 122.56,175.13 122.56,177.23 120.84,178.94 v2(118.75,178.94) ; 122.56,175.13 122.56,171.96 ; v1(114.3,168.78) 114.94,169.42 121.92,169.42 122.56,168.78 ; 122.56,168.78 v1(122.56,166.24) v1(122.56,161.16) v1(122.56,156.08) v1(122.56,150.37) v1(122.56,145.29) 122.56,140.21 121.92,139.57 116.84,139.57 113.96,142.46 CT8.2 103.64,144.02 103.19,143.56 RT41.2 v1(93.52,143.56) 90.98,143.56 87,139.57 JT5.14 78.74,137.92 77.85,137.03 75.56,137.03 73.03,139.57 73.03,168.15 73.66,168.78 78.49,168.78 78.74,169.04 JT2.14 ; 122.56,168.78 122.56,171.96
GND_9: length 161
  TOP w0.508: v1(180.34,171.96) 180.96,172.58 187.98,172.58 188.59,171.96 ; 188.59,171.96 188.59,168.78 ; 188.59,171.96 188.59,175.13 ; v1(180.34,168.78) 180.97,169.42 187.96,169.42 188.59,168.78 ; JT3.14 144.78,169.04 144.53,168.78 139.7,168.78 139.06,168.15 139.06,139.57 141.6,137.03 143.89,137.03 144.78,137.92 JT6.14 153.03,139.57 157.02,143.56 v1(159.56,143.56) RT42.2 169.23,143.56 169.68,144.02 CT9.2 180,142.46 182.88,139.57 187.96,139.57 188.59,140.21 v1(188.59,145.29) v1(188.59,150.37) v1(188.59,156.08) v1(188.59,161.16) v1(188.59,166.24) 188.59,168.78 ; 188.59,175.13 188.59,177.23 186.88,178.94 v2(184.78,178.94) ; 188.59,175.13 187.96,175.77 180.97,175.77 v1(180.34,175.13)
-HV_1: length 82.2
  TOP w0.254: v2(49.53,53.85) 44.27,48.59 RT85.1 27.76,48.59 v1(27.3,48.13) 21.59,48.13 15.24,54.48 11.43,54.48 JT13.1
  BOTTOM w0.254: JT16.1 10.16,28.45 13.97,32.26 16.51,32.26 18.41,34.16 18.41,44.96 21.59,48.13 v1(27.3,48.13)
-HV_2: length 82.2
  TOP w0.254: v2(115.57,53.85) 110.31,48.59 RT86.1 93.8,48.59 v1(93.34,48.13) 87.63,48.13 81.28,54.48 77.47,54.48 JT14.1
  BOTTOM w0.254: JT17.1 76.2,28.45 80.01,32.26 82.55,32.26 84.45,34.16 84.45,44.96 87.63,48.13 v1(93.34,48.13)
-HV_3: length 82.2
  TOP w0.254: v2(181.61,53.85) 176.35,48.59 RT87.1 159.84,48.59 v1(159.38,48.13) 153.67,48.13 147.32,54.48 143.51,54.48 JT15.1
  BOTTOM w0.254: JT18.1 142.24,28.45 146.05,32.26 148.59,32.26 150.5,34.16 150.5,44.96 153.67,48.13 v1(159.38,48.13)
-HV_4: length 82.2
  TOP w0.254: JT7.1 11.43,120.52 15.24,120.52 21.59,114.17 v1(27.3,114.17) 27.76,114.63 RT43.1 44.27,114.63 v2(49.53,119.89)
  BOTTOM w0.254: 10.16,88.77 10.16,94.49 13.97,98.3 16.51,98.3 18.41,100.2 18.41,111 21.59,114.17 v1(27.3,114.17)
-HV_5: length 82.2
  TOP w0.254: v2(115.57,119.89) 110.31,114.63 RT44.1 93.8,114.63 v1(93.34,114.17) 87.63,114.17 81.28,120.52 77.47,120.52 JT8.1
  BOTTOM w0.254: v1(93.34,114.17) 87.63,114.17 84.45,111 84.45,100.2 82.55,98.3 80.01,98.3 76.2,94.49 76.2,88.77
-HV_6: length 82.2
  TOP w0.254: v2(181.61,119.89) 176.35,114.63 RT45.1 159.84,114.63 v1(159.38,114.17) 153.67,114.17 147.32,120.52 143.51,120.52 JT9.1
  BOTTOM w0.254: v1(159.38,114.17) 153.67,114.17 150.5,111 150.5,100.2 148.59,98.3 146.05,98.3 142.24,94.49 142.24,88.77
-HV_7: length 82.2
  TOP w0.254: v2(49.53,185.93) 44.27,180.67 RT1.1 27.76,180.67 v1(27.3,180.21) 21.59,180.21 15.24,186.56 11.43,186.56 JT1.1
  BOTTOM w0.254: v1(27.3,180.21) 21.59,180.21 18.41,177.04 18.41,166.24 16.51,164.34 13.97,164.34 10.16,160.53 10.16,154.81
-HV_8: length 82.2
  TOP w0.254: v2(115.57,185.93) 110.31,180.67 RT2.1 93.8,180.67 v1(93.34,180.21) 87.63,180.21 81.28,186.56 77.47,186.56 JT2.1
  BOTTOM w0.254: v1(93.34,180.21) 87.63,180.21 84.45,177.04 84.45,166.24 82.55,164.34 80.01,164.34 76.2,160.53 76.2,154.81
-HV_9: length 82.2
  TOP w0.254: v2(181.61,185.93) 176.35,180.67 RT3.1 159.84,180.67 v1(159.38,180.21) 153.67,180.21 147.32,186.56 143.51,186.56 JT3.1
  BOTTOM w0.254: v1(159.38,180.21) 153.67,180.21 150.5,177.04 150.5,166.24 148.59,164.34 146.05,164.34 142.24,160.53 142.24,154.81
ACC_1: length 12.2
  TOP w0.254: RT106.1 v1(53.34,23.37)
  BOTTOM w0.254: v1(53.34,23.37) 48.9,27.81 v1(48.9,31.62)
ACC_2: length 12.2
  TOP w0.254: RT107.1 v1(119.38,23.37)
  BOTTOM w0.254: v1(119.38,23.37) 114.94,27.81 v1(114.94,31.62)
ACC_3: length 12.2
  TOP w0.254: RT108.1 v1(185.42,23.37)
  BOTTOM w0.254: v1(180.97,31.62) 180.97,27.81 v1(185.42,23.37)
ACC_4: length 12.2
  TOP w0.254: RT64.1 v1(53.34,89.41)
  BOTTOM w0.254: v1(48.9,97.66) 48.9,93.85 v1(53.34,89.41)
ACC_5: length 12.2
  TOP w0.254: RT65.1 v1(119.38,89.41)
  BOTTOM w0.254: v1(119.38,89.41) 114.94,93.85 v1(114.94,97.66)
ACC_6: length 12.2
  TOP w0.254: RT66.1 v1(185.42,89.41)
  BOTTOM w0.254: v1(185.42,89.41) 180.97,93.85 v1(180.97,97.66)
ACC_7: length 12.2
  TOP w0.254: RT22.1 v1(53.34,155.45)
  BOTTOM w0.254: v1(53.34,155.45) 48.9,159.89 v1(48.9,163.7)
ACC_8: length 12.2
  TOP w0.254: RT23.1 v1(119.38,155.45)
  BOTTOM w0.254: v1(119.38,155.45) 114.94,159.89 v1(114.94,163.7)
ACC_9: length 12.2
  TOP w0.254: RT24.1 v1(185.42,155.45)
  BOTTOM w0.254: v1(185.42,155.45) 180.97,159.89 v1(180.97,163.7)
UNNAMED_1_CONN14_I18_5_1: length 71.5
  TOP w0.254: RT85.2 37.5,45.14 37.15,44.78 RT88.1 v1(25.22,44.78) 21.13,44.78 16.51,49.4 11.43,49.4 JT13.5
  BOTTOM w0.254: v1(25.22,44.78) 20.78,44.78 19.68,43.69 19.68,33.53 17.14,30.99 13.97,30.99 11.43,28.45 11.43,18.92 JT16.5
UNNAMED_1_CONN14_I18_5_2: length 71.5
  TOP w0.254: RT86.2 103.54,45.14 103.19,44.78 RT89.1 v1(91.26,44.78) 87.17,44.78 82.55,49.4 77.47,49.4 JT14.5
  BOTTOM w0.254: v1(91.26,44.78) 86.82,44.78 85.72,43.69 85.72,33.53 83.19,30.99 80.01,30.99 77.47,28.45 77.47,18.92 JT17.5
UNNAMED_1_CONN14_I18_5_3: length 71.5
  TOP w0.254: JT15.5 143.51,49.4 148.59,49.4 153.21,44.78 v1(157.3,44.78) RT90.1 169.23,44.78 169.58,45.14 RT87.2
  BOTTOM w0.254: v1(157.3,44.78) 152.86,44.78 151.76,43.69 151.76,33.53 149.22,30.99 146.05,30.99 143.51,28.45 143.51,18.92 JT18.5
UNNAMED_1_CONN14_I18_5_4: length 71.5
  TOP w0.254: RT43.2 37.5,111.18 37.15,110.82 RT46.1 v1(25.22,110.82) 21.13,110.82 16.51,115.44 11.43,115.44 JT7.5
  BOTTOM w0.254: v1(25.22,110.82) 20.78,110.82 19.68,109.73 19.68,99.57 17.14,97.03 13.97,97.03 11.43,94.49 11.43,84.96 10.16,83.69
UNNAMED_1_CONN14_I18_5_5: length 71.5
  TOP w0.254: RT44.2 103.54,111.18 103.19,110.82 RT47.1 v1(91.26,110.82) 87.17,110.82 82.55,115.44 77.47,115.44 JT8.5
  BOTTOM w0.254: v1(91.26,110.82) 86.82,110.82 85.72,109.73 85.72,99.57 83.19,97.03 80.01,97.03 77.47,94.49 77.47,84.96 76.2,83.69
UNNAMED_1_CONN14_I18_5_6: length 71.5
  TOP w0.254: RT45.2 169.58,111.18 169.23,110.82 RT48.1 v1(157.3,110.82) 153.21,110.82 148.59,115.44 143.51,115.44 JT9.5
  BOTTOM w0.254: v1(157.3,110.82) 152.86,110.82 151.76,109.73 151.76,99.57 149.22,97.03 146.05,97.03 143.51,94.49 143.51,84.96 142.24,83.69
UNNAMED_1_CONN14_I18_5_7: length 71.5
  TOP w0.254: RT1.2 37.5,177.22 37.15,176.86 RT4.1 v1(25.22,176.86) 21.13,176.86 16.51,181.48 11.43,181.48 JT1.5
  BOTTOM w0.254: v1(25.22,176.86) 20.78,176.86 19.68,175.77 19.68,165.61 17.14,163.07 13.97,163.07 11.43,160.53 11.43,151 JT4.5
UNNAMED_1_CONN14_I18_5_8: length 71.5
  TOP w0.254: JT2.5 77.47,181.48 82.55,181.48 87.17,176.86 v1(91.26,176.86) RT5.1 103.19,176.86 103.54,177.22 RT2.2
  BOTTOM w0.254: JT5.5 77.47,151 77.47,160.53 80.01,163.07 83.19,163.07 85.72,165.61 85.72,175.77 86.82,176.86 v1(91.26,176.86)
UNNAMED_1_CONN14_I18_5_9: length 71.5
  TOP w0.254: RT3.2 169.58,177.22 169.23,176.86 RT6.1 v1(157.3,176.86) 153.21,176.86 148.59,181.48 143.51,181.48 JT3.5
  BOTTOM w0.254: JT6.5 143.51,151 143.51,160.53 146.05,163.07 149.22,163.07 151.76,165.61 151.76,175.77 152.86,176.86 v1(157.3,176.86)
UNNAMED_1_CONN14_I18_6_1: length 66.1
  TOP w0.254: RT91.1 37.5,40.97 37.15,41.33 RT88.2 35.24,41.33 35.06,41.15 v1(27.3,41.15) 21.59,41.15 14.61,48.13 JT13.6
  BOTTOM w0.254: v1(27.3,41.15) 22.23,41.15 20.95,39.88 20.95,32.89 17.78,29.72 14.61,29.72 13.97,29.08 13.97,18.92 JT16.6
UNNAMED_1_CONN14_I18_6_2: length 66.1
  TOP w0.254: RT92.1 103.54,40.97 103.19,41.33 RT89.2 101.28,41.33 101.1,41.15 v1(93.34,41.15) 87.63,41.15 80.64,48.13 JT14.6
  BOTTOM w0.254: v1(93.34,41.15) 88.27,41.15 87,39.88 87,32.89 83.82,29.72 80.64,29.72 80.01,29.08 80.01,18.92 JT17.6
UNNAMED_1_CONN14_I18_6_3: length 66.1
  TOP w0.254: RT93.1 169.58,40.97 169.23,41.33 RT90.2 167.32,41.33 167.14,41.15 v1(159.38,41.15) 153.67,41.15 146.69,48.13 JT15.6
  BOTTOM w0.254: v1(159.38,41.15) 154.31,41.15 153.03,39.88 153.03,32.89 149.86,29.72 146.69,29.72 146.05,29.08 146.05,18.92 JT18.6
UNNAMED_1_CONN14_I18_6_4: length 66.1
  TOP w0.254: JT7.6 14.61,114.17 21.59,107.19 v1(27.3,107.19) 35.06,107.19 35.24,107.37 RT46.2 37.15,107.37 37.5,107.01 RT49.1
  BOTTOM w0.254: v1(27.3,107.19) 22.23,107.19 20.95,105.92 20.95,98.93 17.78,95.76 14.61,95.76 13.97,95.12 13.97,84.96 12.7,83.69
UNNAMED_1_CONN14_I18_6_5: length 66.1
  TOP w0.254: RT50.1 103.54,107.01 103.19,107.37 RT47.2 101.28,107.37 101.1,107.19 v1(93.34,107.19) 87.63,107.19 80.64,114.17 JT8.6
  BOTTOM w0.254: v1(93.34,107.19) 88.27,107.19 87,105.92 87,98.93 83.82,95.76 80.64,95.76 80.01,95.12 80.01,84.96 78.74,83.69
UNNAMED_1_CONN14_I18_6_6: length 66.1
  TOP w0.254: RT51.1 169.58,107.01 169.23,107.37 RT48.2 167.32,107.37 167.14,107.19 v1(159.38,107.19) 153.67,107.19 146.69,114.17 JT9.6
  BOTTOM w0.254: v1(159.38,107.19) 154.31,107.19 153.03,105.92 153.03,98.93 149.86,95.76 146.69,95.76 146.05,95.12 146.05,84.96 144.78,83.69
UNNAMED_1_CONN14_I18_6_7: length 66.1
  TOP w0.254: JT1.6 14.61,180.21 21.59,173.23 v1(27.3,173.23) 35.06,173.23 35.24,173.41 RT4.2 37.15,173.41 37.5,173.05 RT7.1
  BOTTOM w0.254: v1(27.3,173.23) 22.23,173.23 20.95,171.96 20.95,164.97 17.78,161.8 14.61,161.8 13.97,161.16 13.97,151 JT4.6
UNNAMED_1_CONN14_I18_6_8: length 66.1
  TOP w0.254: JT2.6 80.64,180.21 87.63,173.23 v1(93.34,173.23) 101.1,173.23 101.28,173.41 RT5.2 103.19,173.41 103.54,173.05 RT8.1
  BOTTOM w0.254: JT5.6 80.01,151 80.01,161.16 80.64,161.8 83.82,161.8 87,164.97 87,171.96 88.27,173.23 v1(93.34,173.23)
UNNAMED_1_CONN14_I18_6_9: length 66.1
  TOP w0.254: RT9.1 169.58,173.05 169.23,173.41 RT6.2 167.32,173.41 167.14,173.23 v1(159.38,173.23) 153.67,173.23 146.69,180.21 JT3.6
  BOTTOM w0.254: JT6.6 146.05,151 146.05,161.16 146.69,161.8 149.86,161.8 153.03,164.97 153.03,171.96 154.31,173.23 v1(159.38,173.23)
UNNAMED_1_CONN14_I18_7_1: length 68.2
  TOP w0.254: RT91.2 37.5,37.52 37.15,37.16 RT94.1 v1(25.22,37.16) 23.04,37.16 13.34,46.86 11.43,46.86 JT13.7
  BOTTOM w0.254: JT16.7 11.43,16.38 13.97,16.38 15.24,17.65 15.24,27.81 15.88,28.45 18.41,28.45 22.23,32.26 22.23,36.07 23.32,37.16 v1(25.22,37.16)
UNNAMED_1_CONN14_I18_7_2: length 68.2
  TOP w0.254: RT92.2 103.54,37.52 103.19,37.16 RT95.1 v1(91.26,37.16) 89.08,37.16 79.38,46.86 77.47,46.86 JT14.7
  BOTTOM w0.254: v1(91.26,37.16) 89.36,37.16 88.27,36.07 88.27,32.26 84.45,28.45 81.92,28.45 81.28,27.81 81.28,17.65 80.01,16.38 77.47,16.38 JT17.7
UNNAMED_1_CONN14_I18_7_3: length 68.2
  TOP w0.254: JT15.7 143.51,46.86 145.41,46.86 155.12,37.16 v1(157.3,37.16) RT96.1 169.23,37.16 169.58,37.52 RT93.2
  BOTTOM w0.254: JT18.7 143.51,16.38 146.05,16.38 147.32,17.65 147.32,27.81 147.96,28.45 150.5,28.45 154.31,32.26 154.31,36.07 155.4,37.16 v1(157.3,37.16)
UNNAMED_1_CONN14_I18_7_4: length 68.2
  TOP w0.254: RT49.2 37.5,103.56 37.15,103.2 RT52.1 v1(25.22,103.2) 23.04,103.2 13.34,112.9 11.43,112.9 JT7.7
  BOTTOM w0.254: v1(25.22,103.2) 23.32,103.2 22.23,102.11 22.23,98.3 18.41,94.49 15.88,94.49 15.24,93.85 15.24,83.69 13.97,82.42 11.43,82.42 JT10.7
UNNAMED_1_CONN14_I18_7_5: length 68.2
  TOP w0.254: JT8.7 77.47,112.9 79.38,112.9 89.08,103.2 v1(91.26,103.2) RT53.1 103.19,103.2 103.54,103.56 RT50.2
  BOTTOM w0.254: JT11.7 77.47,82.42 80.01,82.42 81.28,83.69 81.28,93.85 81.92,94.49 84.45,94.49 88.27,98.3 88.27,102.11 89.36,103.2 v1(91.26,103.2)
UNNAMED_1_CONN14_I18_7_6: length 68.2
  TOP w0.254: RT51.2 169.58,103.56 169.23,103.2 RT54.1 v1(157.3,103.2) 155.12,103.2 145.41,112.9 143.51,112.9 JT9.7
  BOTTOM w0.254: v1(157.3,103.2) 155.4,103.2 154.31,102.11 154.31,98.3 150.5,94.49 147.96,94.49 147.32,93.85 147.32,83.69 146.05,82.42 143.51,82.42 JT12.7
UNNAMED_1_CONN14_I18_7_7: length 68.2
  TOP w0.254: JT1.7 11.43,178.94 13.34,178.94 23.04,169.24 v1(25.22,169.24) RT10.1 37.15,169.24 37.5,169.6 RT7.2
  BOTTOM w0.254: JT4.7 11.43,148.46 13.97,148.46 15.24,149.73 15.24,159.89 15.88,160.53 18.41,160.53 22.23,164.34 22.23,168.15 23.32,169.24 v1(25.22,169.24)
UNNAMED_1_CONN14_I18_7_8: length 68.2
  TOP w0.254: RT8.2 103.54,169.6 103.19,169.24 RT11.1 v1(91.26,169.24) 89.08,169.24 79.38,178.94 77.47,178.94 JT2.7
  BOTTOM w0.254: JT5.7 77.47,148.46 80.01,148.46 81.28,149.73 81.28,159.89 81.92,160.53 84.45,160.53 88.27,164.34 88.27,168.15 89.36,169.24 v1(91.26,169.24)
UNNAMED_1_CONN14_I18_7_9: length 68.2
  TOP w0.254: RT9.2 169.58,169.6 169.23,169.24 RT12.1 v1(157.3,169.24) 155.12,169.24 145.41,178.94 143.51,178.94 JT3.7
  BOTTOM w0.254: v1(157.3,169.24) 155.4,169.24 154.31,168.15 154.31,164.34 150.5,160.53 147.96,160.53 147.32,159.89 147.32,149.73 146.05,148.46 143.51,148.46 JT6.7
UNNAMED_1_CONN14_I18_8_1: length 62.9
  TOP w0.254: JT13.8 12.7,44.58 12.95,44.32 13.34,44.32 24.13,33.53 v1(27.3,33.53) 35.06,33.53 35.24,33.71 RT94.2 37.15,33.71 37.5,33.35 RT97.1
  BOTTOM w0.254: JT16.8 15.24,15.11 17.14,17.02 17.14,26.54 17.78,27.18 19.05,27.18 23.5,31.62 23.5,32.89 24.13,33.53 v1(27.3,33.53)
UNNAMED_1_CONN14_I18_8_2: length 62.9
  TOP w0.254: RT98.1 103.54,33.35 103.19,33.71 RT95.2 101.28,33.71 101.1,33.53 v1(93.34,33.53) 90.17,33.53 79.38,44.32 78.99,44.32 78.74,44.58 JT14.8
  BOTTOM w0.254: JT17.8 81.28,15.11 83.19,17.02 83.19,26.54 83.82,27.18 85.09,27.18 89.53,31.62 89.53,32.89 90.17,33.53 v1(93.34,33.53)
UNNAMED_1_CONN14_I18_8_3: length 62.9
  TOP w0.254: RT99.1 169.58,33.35 169.23,33.71 RT96.2 167.32,33.71 167.14,33.53 v1(159.38,33.53) 156.21,33.53 145.41,44.32 145.03,44.32 144.78,44.58 JT15.8
  BOTTOM w0.254: v1(159.38,33.53) 156.21,33.53 155.57,32.89 155.57,31.62 151.13,27.18 149.86,27.18 149.22,26.54 149.22,17.02 147.32,15.11 JT18.8
UNNAMED_1_CONN14_I18_8_4: length 62.9
  TOP w0.254: RT55.1 37.5,99.39 37.15,99.75 RT52.2 35.24,99.75 35.06,99.57 v1(27.3,99.57) 24.13,99.57 13.34,110.36 12.95,110.36 12.7,110.62 JT7.8
  BOTTOM w0.254: JT10.8 15.24,81.15 17.14,83.06 17.14,92.58 17.78,93.22 19.05,93.22 23.5,97.66 23.5,98.93 24.13,99.57 v1(27.3,99.57)
UNNAMED_1_CONN14_I18_8_5: length 62.9
  TOP w0.254: JT8.8 78.74,110.62 78.99,110.36 79.38,110.36 90.17,99.57 v1(93.34,99.57) 101.1,99.57 101.28,99.75 RT53.2 103.19,99.75 103.54,99.39 RT56.1
  BOTTOM w0.254: JT11.8 81.28,81.15 83.19,83.06 83.19,92.58 83.82,93.22 85.09,93.22 89.53,97.66 89.53,98.93 90.17,99.57 v1(93.34,99.57)
UNNAMED_1_CONN14_I18_8_6: length 62.9
  TOP w0.254: RT57.1 169.58,99.39 169.23,99.75 RT54.2 167.32,99.75 167.14,99.57 v1(159.38,99.57) 156.21,99.57 145.41,110.36 145.03,110.36 144.78,110.62 JT9.8
  BOTTOM w0.254: v1(159.38,99.57) 156.21,99.57 155.57,98.93 155.57,97.66 151.13,93.22 149.86,93.22 149.22,92.58 149.22,83.06 147.32,81.15 JT12.8
UNNAMED_1_CONN14_I18_8_7: length 62.9
  TOP w0.254: JT1.8 12.7,176.66 12.95,176.4 13.34,176.4 24.13,165.61 v1(27.3,165.61) 35.06,165.61 35.24,165.79 RT10.2 37.15,165.79 37.5,165.43 RT13.1
  BOTTOM w0.254: JT4.8 15.24,147.19 17.14,149.1 17.14,158.62 17.78,159.26 19.05,159.26 23.5,163.7 23.5,164.97 24.13,165.61 v1(27.3,165.61)
UNNAMED_1_CONN14_I18_8_8: length 62.9
  TOP w0.254: JT2.8 78.74,176.66 78.99,176.4 79.38,176.4 90.17,165.61 v1(93.34,165.61) 101.1,165.61 101.28,165.79 RT11.2 103.19,165.79 103.54,165.43 RT14.1
  BOTTOM w0.254: v1(93.34,165.61) 90.17,165.61 89.53,164.97 89.53,163.7 85.09,159.26 83.82,159.26 83.19,158.62 83.19,149.1 81.28,147.19 JT5.8
UNNAMED_1_CONN14_I18_8_9: length 62.9
  TOP w0.254: RT15.1 169.58,165.43 169.23,165.79 RT12.2 167.32,165.79 167.14,165.61 v1(159.38,165.61) 156.21,165.61 145.41,176.4 145.03,176.4 144.78,176.66 JT3.8
  BOTTOM w0.254: JT6.8 147.32,147.19 149.22,149.1 149.22,158.62 149.86,159.26 151.13,159.26 155.57,163.7 155.57,164.97 156.21,165.61 v1(159.38,165.61)
UNNAMED_1_CONN14_I18_9_1: length 65.2
  TOP w0.254: 10.16,43.05 11.43,41.78 13.34,41.78 v1(25.4,29.72) 35.06,29.72 35.24,29.54 RT100.1 37.15,29.54 37.5,29.9 RT97.2
  BOTTOM w0.254: JT16.9 11.43,13.84 17.14,13.84 18.41,15.11 18.41,25.27 19.05,25.91 20.32,25.91 24.13,29.72 v1(25.4,29.72)
UNNAMED_1_CONN14_I18_9_2: length 65.2
  TOP w0.254: RT98.2 103.54,29.9 103.19,29.54 RT101.1 101.28,29.54 101.1,29.72 v1(91.44,29.72) 79.38,41.78 77.47,41.78 76.2,43.05
  BOTTOM w0.254: JT17.9 77.47,13.84 83.19,13.84 84.45,15.11 84.45,25.27 85.09,25.91 86.36,25.91 90.17,29.72 v1(91.44,29.72)
UNNAMED_1_CONN14_I18_9_3: length 65.2
  TOP w0.254: 142.24,43.05 143.51,41.78 145.41,41.78 v1(157.48,29.72) 167.14,29.72 167.32,29.54 RT102.1 169.23,29.54 169.58,29.9 RT99.2
  BOTTOM w0.254: JT18.9 143.51,13.84 149.22,13.84 150.5,15.11 150.5,25.27 151.13,25.91 152.4,25.91 156.21,29.72 v1(157.48,29.72)
UNNAMED_1_CONN14_I18_9_4: length 65.2
  TOP w0.254: JT7.9 11.43,107.82 13.34,107.82 v1(25.4,95.76) 35.06,95.76 35.24,95.58 RT58.1 37.15,95.58 37.5,95.94 RT55.2
  BOTTOM w0.254: v1(25.4,95.76) 24.13,95.76 20.32,91.95 19.05,91.95 18.41,91.31 18.41,81.15 17.14,79.88 11.43,79.88 JT10.9
UNNAMED_1_CONN14_I18_9_5: length 65.2
  TOP w0.254: JT8.9 77.47,107.82 79.38,107.82 v1(91.44,95.76) 101.1,95.76 101.28,95.58 RT59.1 103.19,95.58 103.54,95.94 RT56.2
  BOTTOM w0.254: JT11.9 77.47,79.88 83.19,79.88 84.45,81.15 84.45,91.31 85.09,91.95 86.36,91.95 90.17,95.76 v1(91.44,95.76)
UNNAMED_1_CONN14_I18_9_6: length 65.2
  TOP w0.254: JT9.9 143.51,107.82 145.41,107.82 v1(157.48,95.76) 167.14,95.76 167.32,95.58 RT60.1 169.23,95.58 169.58,95.94 RT57.2
  BOTTOM w0.254: v1(157.48,95.76) 156.21,95.76 152.4,91.95 151.13,91.95 150.5,91.31 150.5,81.15 149.22,79.88 143.51,79.88 JT12.9
UNNAMED_1_CONN14_I18_9_7: length 65.2
  TOP w0.254: JT1.9 11.43,173.86 13.34,173.86 v1(25.4,161.8) 35.06,161.8 35.24,161.62 RT16.1 37.15,161.62 37.5,161.98 RT13.2
  BOTTOM w0.254: v1(25.4,161.8) 24.13,161.8 20.32,157.99 19.05,157.99 18.41,157.35 18.41,147.19 17.14,145.92 11.43,145.92 10.16,144.65
UNNAMED_1_CONN14_I18_9_8: length 65.2
  TOP w0.254: JT2.9 77.47,173.86 79.38,173.86 v1(91.44,161.8) 101.1,161.8 101.28,161.62 RT17.1 103.19,161.62 103.54,161.98 RT14.2
  BOTTOM w0.254: 76.2,144.65 77.47,145.92 83.19,145.92 84.45,147.19 84.45,157.35 85.09,157.99 86.36,157.99 90.17,161.8 v1(91.44,161.8)
UNNAMED_1_CONN14_I18_9_9: length 65.2
  TOP w0.254: RT15.2 169.58,161.98 169.23,161.62 RT18.1 167.32,161.62 167.14,161.8 v1(157.48,161.8) 145.41,173.86 143.51,173.86 JT3.9
  BOTTOM w0.254: 142.24,144.65 143.51,145.92 149.22,145.92 150.5,147.19 150.5,157.35 151.13,157.99 152.4,157.99 156.21,161.8 v1(157.48,161.8)
UNNAMED_1_CONN14_I18_10_1: length 72.8
  TOP w0.254: RT103.1 37.5,25.73 37.15,26.09 RT100.2 v1(27.48,26.09) 26.21,26.09 JT16.10 11.43,13.84 9.53,13.84 v1(8.26,15.11)
  BOTTOM w0.254: v1(8.26,15.11) 8.26,29.08 16.51,37.34 16.51,39.24 12.7,43.05
UNNAMED_1_CONN14_I18_10_2: length 72.8
  TOP w0.254: RT104.1 103.54,25.73 103.19,26.09 RT101.2 v1(93.52,26.09) 92.25,26.09 JT17.10 77.47,13.84 75.56,13.84 v1(74.3,15.11)
  BOTTOM w0.254: v1(74.3,15.11) 74.3,29.08 82.55,37.34 82.55,39.24 78.74,43.05
UNNAMED_1_CONN14_I18_10_3: length 72.8
  TOP w0.254: v1(140.34,15.11) 141.6,13.84 143.51,13.84 JT18.10 158.29,26.09 v1(159.56,26.09) RT102.2 169.23,26.09 169.58,25.73 RT105.1
  BOTTOM w0.254: 144.78,43.05 148.59,39.24 148.59,37.34 140.34,29.08 v1(140.34,15.11)
UNNAMED_1_CONN14_I18_10_4: length 72.8
  TOP w0.254: v1(8.26,81.15) 9.53,79.88 11.43,79.88 JT10.10 26.21,92.13 v1(27.48,92.13) RT58.2 37.15,92.13 37.5,91.77 RT61.1
  BOTTOM w0.254: JT7.10 16.51,105.28 16.51,103.38 8.26,95.12 v1(8.26,81.15)
UNNAMED_1_CONN14_I18_10_5: length 72.8
  TOP w0.254: RT62.1 103.54,91.77 103.19,92.13 RT59.2 v1(93.52,92.13) 92.25,92.13 JT11.10 77.47,79.88 75.56,79.88 v1(74.3,81.15)
  BOTTOM w0.254: v1(74.3,81.15) 74.3,95.12 82.55,103.38 82.55,105.28 JT8.10
UNNAMED_1_CONN14_I18_10_6: length 72.8
  TOP w0.254: RT63.1 169.58,91.77 169.23,92.13 RT60.2 v1(159.56,92.13) 158.29,92.13 JT12.10 143.51,79.88 141.6,79.88 v1(140.34,81.15)
  BOTTOM w0.254: v1(140.34,81.15) 140.34,95.12 148.59,103.38 148.59,105.28 JT9.10
UNNAMED_1_CONN14_I18_10_7: length 72.8
  TOP w0.254: v1(8.26,147.19) 9.53,145.92 11.43,145.92 12.7,144.65 26.21,158.17 v1(27.48,158.17) RT16.2 37.15,158.17 37.5,157.81 RT19.1
  BOTTOM w0.254: v1(8.26,147.19) 8.26,161.16 16.51,169.42 16.51,171.32 JT1.10
UNNAMED_1_CONN14_I18_10_8: length 72.8
  TOP w0.254: v1(74.3,147.19) 75.56,145.92 77.47,145.92 78.74,144.65 92.25,158.17 v1(93.52,158.17) RT17.2 103.19,158.17 103.54,157.81 RT20.1
  BOTTOM w0.254: JT2.10 82.55,171.32 82.55,169.42 74.3,161.16 v1(74.3,147.19)
UNNAMED_1_CONN14_I18_10_9: length 72.8
  TOP w0.254: v1(140.34,147.19) 141.6,145.92 143.51,145.92 144.78,144.65 158.29,158.17 v1(159.56,158.17) RT18.2 169.23,158.17 169.58,157.81 RT21.1
  BOTTOM w0.254: v1(140.34,147.19) 140.34,161.16 148.59,169.42 148.59,171.32 JT3.10
UNNAMED_1_CONN14_I18_11_1: length 65.7
  TOP w0.254: 10.16,40.51 4.45,40.51 2.54,38.61 v1(2.54,16.38) ; JT16.11 11.43,11.3 14.61,11.3 v1(25.4,22.1) RT109.2
  BOTTOM w0.254: JT16.11 8.89,10.03 v1(2.54,16.38)
UNNAMED_1_CONN14_I18_11_2: length 65.7
  TOP w0.254: v1(68.58,16.38) 68.58,38.61 70.48,40.51 76.2,40.51 ; RT110.2 v1(91.44,22.1) 80.64,11.3 77.47,11.3 JT17.11
  BOTTOM w0.254: v1(68.58,16.38) 74.93,10.03 JT17.11
UNNAMED_1_CONN14_I18_11_3: length 65.7
  TOP w0.254: v1(134.62,16.38) 134.62,38.61 136.53,40.51 142.24,40.51 ; JT18.11 143.51,11.3 146.69,11.3 v1(157.48,22.1) RT111.2
  BOTTOM w0.254: v1(134.62,16.38) 140.97,10.03 JT18.11
UNNAMED_1_CONN14_I18_11_4: length 65.7
  TOP w0.254: RT67.2 v1(25.4,88.14) 14.61,77.34 11.43,77.34 10.16,76.07 ; JT7.11 4.45,106.55 2.54,104.65 v1(2.54,82.42)
  BOTTOM w0.254: 10.16,76.07 8.89,76.07 v1(2.54,82.42)
UNNAMED_1_CONN14_I18_11_5: length 65.7
  TOP w0.254: 76.2,76.07 77.47,77.34 80.64,77.34 v1(91.44,88.14) RT68.2 ; v1(68.58,82.42) 68.58,104.65 70.48,106.55 JT8.11
  BOTTOM w0.254: 76.2,76.07 74.93,76.07 v1(68.58,82.42)
UNNAMED_1_CONN14_I18_11_6: length 65.7
  TOP w0.254: RT69.2 v1(157.48,88.14) 146.69,77.34 143.51,77.34 142.24,76.07 ; JT9.11 136.53,106.55 134.62,104.65 v1(134.62,82.42)
  BOTTOM w0.254: 142.24,76.07 140.97,76.07 v1(134.62,82.42)
UNNAMED_1_CONN14_I18_11_7: length 65.7
  TOP w0.254: RT25.2 v1(25.4,154.18) 14.61,143.38 11.43,143.38 JT4.11 ; JT1.11 4.45,172.59 2.54,170.69 v1(2.54,148.46)
  BOTTOM w0.254: v1(2.54,148.46) 8.89,142.11 JT4.11
UNNAMED_1_CONN14_I18_11_8: length 65.7
  TOP w0.254: RT26.2 v1(91.44,154.18) 80.64,143.38 77.47,143.38 JT5.11 ; JT2.11 70.48,172.59 68.58,170.69 v1(68.58,148.46)
  BOTTOM w0.254: v1(68.58,148.46) 74.93,142.11 JT5.11
UNNAMED_1_CONN14_I18_11_9: length 65.7
  TOP w0.254: JT6.11 143.51,143.38 146.69,143.38 v1(157.48,154.18) RT27.2 ; v1(134.62,148.46) 134.62,170.69 136.53,172.59 JT3.11
  BOTTOM w0.254: JT6.11 140.97,142.11 v1(134.62,148.46)
UNNAMED_1_CONN14_I18_12_1: length 86.3
  TOP w0.254: JT16.12 16.51,10.03 25.4,18.92 v1(27.3,18.92) RT115.2 30.02,18.99 31.23,20.19 42.55,20.19 45.72,23.37 RT106.2 ; v1(3.81,13.84) 3.81,37.97 5.08,39.24 11.43,39.24 12.7,40.51
  BOTTOM w0.254: v1(3.81,13.84) 8.89,8.76 11.43,8.76 JT16.12
UNNAMED_1_CONN14_I18_12_2: length 86.3
  TOP w0.254: 78.74,40.51 77.47,39.24 71.12,39.24 69.85,37.97 v1(69.85,13.84) ; JT17.12 82.55,10.03 91.44,18.92 v1(93.34,18.92) RT116.2 96.06,18.99 97.27,20.19 108.58,20.19 111.76,23.37 RT107.2
  BOTTOM w0.254: JT17.12 77.47,8.76 74.93,8.76 v1(69.85,13.84)
UNNAMED_1_CONN14_I18_12_3: length 86.3
  TOP w0.254: JT18.12 148.59,10.03 157.48,18.92 v1(159.38,18.92) RT117.2 162.1,18.99 163.31,20.19 174.62,20.19 177.8,23.37 RT108.2 ; v1(135.89,13.84) 135.89,37.97 137.16,39.24 143.51,39.24 144.78,40.51
  BOTTOM w0.254: v1(135.89,13.84) 140.97,8.76 143.51,8.76 JT18.12
UNNAMED_1_CONN14_I18_12_4: length 86.3
  TOP w0.254: JT7.12 11.43,105.28 5.08,105.28 3.81,104.01 v1(3.81,79.88) ; RT64.2 45.72,89.41 42.55,86.23 31.23,86.23 30.02,85.03 RT73.2 v1(27.3,84.96) 25.4,84.96 16.51,76.07 12.7,76.07
  BOTTOM w0.254: 12.7,76.07 11.43,74.8 8.89,74.8 v1(3.81,79.88)
UNNAMED_1_CONN14_I18_12_5: length 86.3
  TOP w0.254: v1(69.85,79.88) 69.85,104.01 71.12,105.28 77.47,105.28 JT8.12 ; 78.74,76.07 82.55,76.07 91.44,84.96 v1(93.34,84.96) RT74.2 96.06,85.03 97.27,86.23 108.58,86.23 111.76,89.41 RT65.2
  BOTTOM w0.254: 78.74,76.07 77.47,74.8 74.93,74.8 v1(69.85,79.88)
UNNAMED_1_CONN14_I18_12_6: length 86.3
  TOP w0.254: v1(135.89,79.88) 135.89,104.01 137.16,105.28 143.51,105.28 JT9.12 ; 144.78,76.07 148.59,76.07 157.48,84.96 v1(159.38,84.96) RT75.2 162.1,85.03 163.31,86.23 174.62,86.23 177.8,89.41 RT66.2
  BOTTOM w0.254: 144.78,76.07 143.51,74.8 140.97,74.8 v1(135.89,79.88)
UNNAMED_1_CONN14_I18_12_7: length 86.3
  TOP w0.254: JT4.12 16.51,142.11 25.4,151 v1(27.3,151) RT31.2 30.02,151.07 31.23,152.27 42.55,152.27 45.72,155.45 RT22.2 ; v1(3.81,145.92) 3.81,170.05 5.08,171.32 11.43,171.32 JT1.12
  BOTTOM w0.254: v1(3.81,145.92) 8.89,140.84 11.43,140.84 JT4.12
UNNAMED_1_CONN14_I18_12_8: length 86.3
  TOP w0.254: v1(69.85,145.92) 69.85,170.05 71.12,171.32 77.47,171.32 JT2.12 ; RT23.2 111.76,155.45 108.58,152.27 97.27,152.27 96.06,151.07 RT32.2 v1(93.34,151) 91.44,151 82.55,142.11 JT5.12
  BOTTOM w0.254: v1(69.85,145.92) 74.93,140.84 77.47,140.84 JT5.12
UNNAMED_1_CONN14_I18_12_9: length 86.3
  TOP w0.254: v1(135.89,145.92) 135.89,170.05 137.16,171.32 143.51,171.32 JT3.12 ; JT6.12 148.59,142.11 157.48,151 v1(159.38,151) RT33.2 162.1,151.07 163.31,152.27 174.62,152.27 177.8,155.45 RT24.2
  BOTTOM w0.254: v1(135.89,145.92) 140.97,140.84 143.51,140.84 JT6.12
UNNAMED_1_CONN14_I18_13_1: length 61.7
  TOP w0.254: v1(5.08,10.67) 5.08,37.34 5.71,37.97 10.16,37.97 ; RT121.2 v1(25.4,15.75) 18.41,8.76 11.43,8.76 JT16.13
  BOTTOM w0.254: v1(5.08,10.67) 8.26,7.49 JT16.13
UNNAMED_1_CONN14_I18_13_2: length 61.7
  TOP w0.254: RT122.2 v1(91.44,15.75) 84.45,8.76 77.47,8.76 JT17.13 ; 76.2,37.97 71.75,37.97 71.12,37.34 v1(71.12,10.67)
  BOTTOM w0.254: JT17.13 74.3,7.49 v1(71.12,10.67)
UNNAMED_1_CONN14_I18_13_3: length 61.7
  TOP w0.254: RT123.2 v1(157.48,15.75) 150.5,8.76 143.51,8.76 JT18.13 ; v1(137.16,10.67) 137.16,37.34 137.79,37.97 142.24,37.97
  BOTTOM w0.254: JT18.13 140.34,7.49 v1(137.16,10.67)
UNNAMED_1_CONN14_I18_13_4: length 61.7
  TOP w0.254: RT79.2 v1(25.4,81.79) 18.41,74.8 11.43,74.8 JT10.13 ; JT7.13 5.71,104.01 5.08,103.38 v1(5.08,76.71)
  BOTTOM w0.254: JT10.13 8.26,73.53 v1(5.08,76.71)
UNNAMED_1_CONN14_I18_13_5: length 61.7
  TOP w0.254: JT11.13 77.47,74.8 84.45,74.8 v1(91.44,81.79) RT80.2 ; JT8.13 71.75,104.01 71.12,103.38 v1(71.12,76.71)
  BOTTOM w0.254: JT11.13 74.3,73.53 v1(71.12,76.71)
UNNAMED_1_CONN14_I18_13_6: length 61.7
  TOP w0.254: JT12.13 143.51,74.8 150.5,74.8 v1(157.48,81.79) RT81.2 ; JT9.13 137.79,104.01 137.16,103.38 v1(137.16,76.71)
  BOTTOM w0.254: JT12.13 140.34,73.53 v1(137.16,76.71)
UNNAMED_1_CONN14_I18_13_7: length 61.7
  TOP w0.254: JT1.13 5.71,170.05 5.08,169.42 v1(5.08,142.75) ; JT4.13 11.43,140.84 18.41,140.84 v1(25.4,147.83) RT37.2
  BOTTOM w0.254: v1(5.08,142.75) 8.26,139.57 JT4.13
UNNAMED_1_CONN14_I18_13_8: length 61.7
  TOP w0.254: v1(71.12,142.75) 71.12,169.42 71.75,170.05 JT2.13 ; RT38.2 v1(91.44,147.83) 84.45,140.84 77.47,140.84 JT5.13
  BOTTOM w0.254: JT5.13 74.3,139.57 v1(71.12,142.75)
UNNAMED_1_CONN14_I18_13_9: length 61.7
  TOP w0.254: RT39.2 v1(157.48,147.83) 150.5,140.84 143.51,140.84 JT6.13 ; JT3.13 137.79,170.05 137.16,169.42 v1(137.16,142.75)
  BOTTOM w0.254: v1(137.16,142.75) 140.34,139.57 JT6.13
UNNAMED_1_CSMD1210_I15_A_1: length 31.6
  TOP w0.254: CT19.1 53.98,19.56 54.61,20.19 54.61,24.64 53.34,25.91 46.35,25.91 42.72,22.28 RT103.2 40.32,22.28 39.97,21.92 RT112.1 35.24,21.92 35.06,22.1 RT109.1
UNNAMED_1_CSMD1210_I15_A_2: length 31.6
  TOP w0.254: RT110.1 101.1,22.1 101.28,21.92 RT113.1 106.01,21.92 106.36,22.28 RT104.2 108.76,22.28 112.39,25.91 119.38,25.91 120.65,24.64 120.65,20.19 120.02,19.56 CT20.1
UNNAMED_1_CSMD1210_I15_A_3: length 31.6
  TOP w0.254: RT111.1 167.14,22.1 167.32,21.92 RT114.1 172.05,21.92 172.4,22.28 RT105.2 174.8,22.28 178.44,25.91 185.42,25.91 186.69,24.64 186.69,20.19 186.06,19.56 CT21.1
